# Allegro board CM4_SATAX4_Substrate_V11-0307.brd
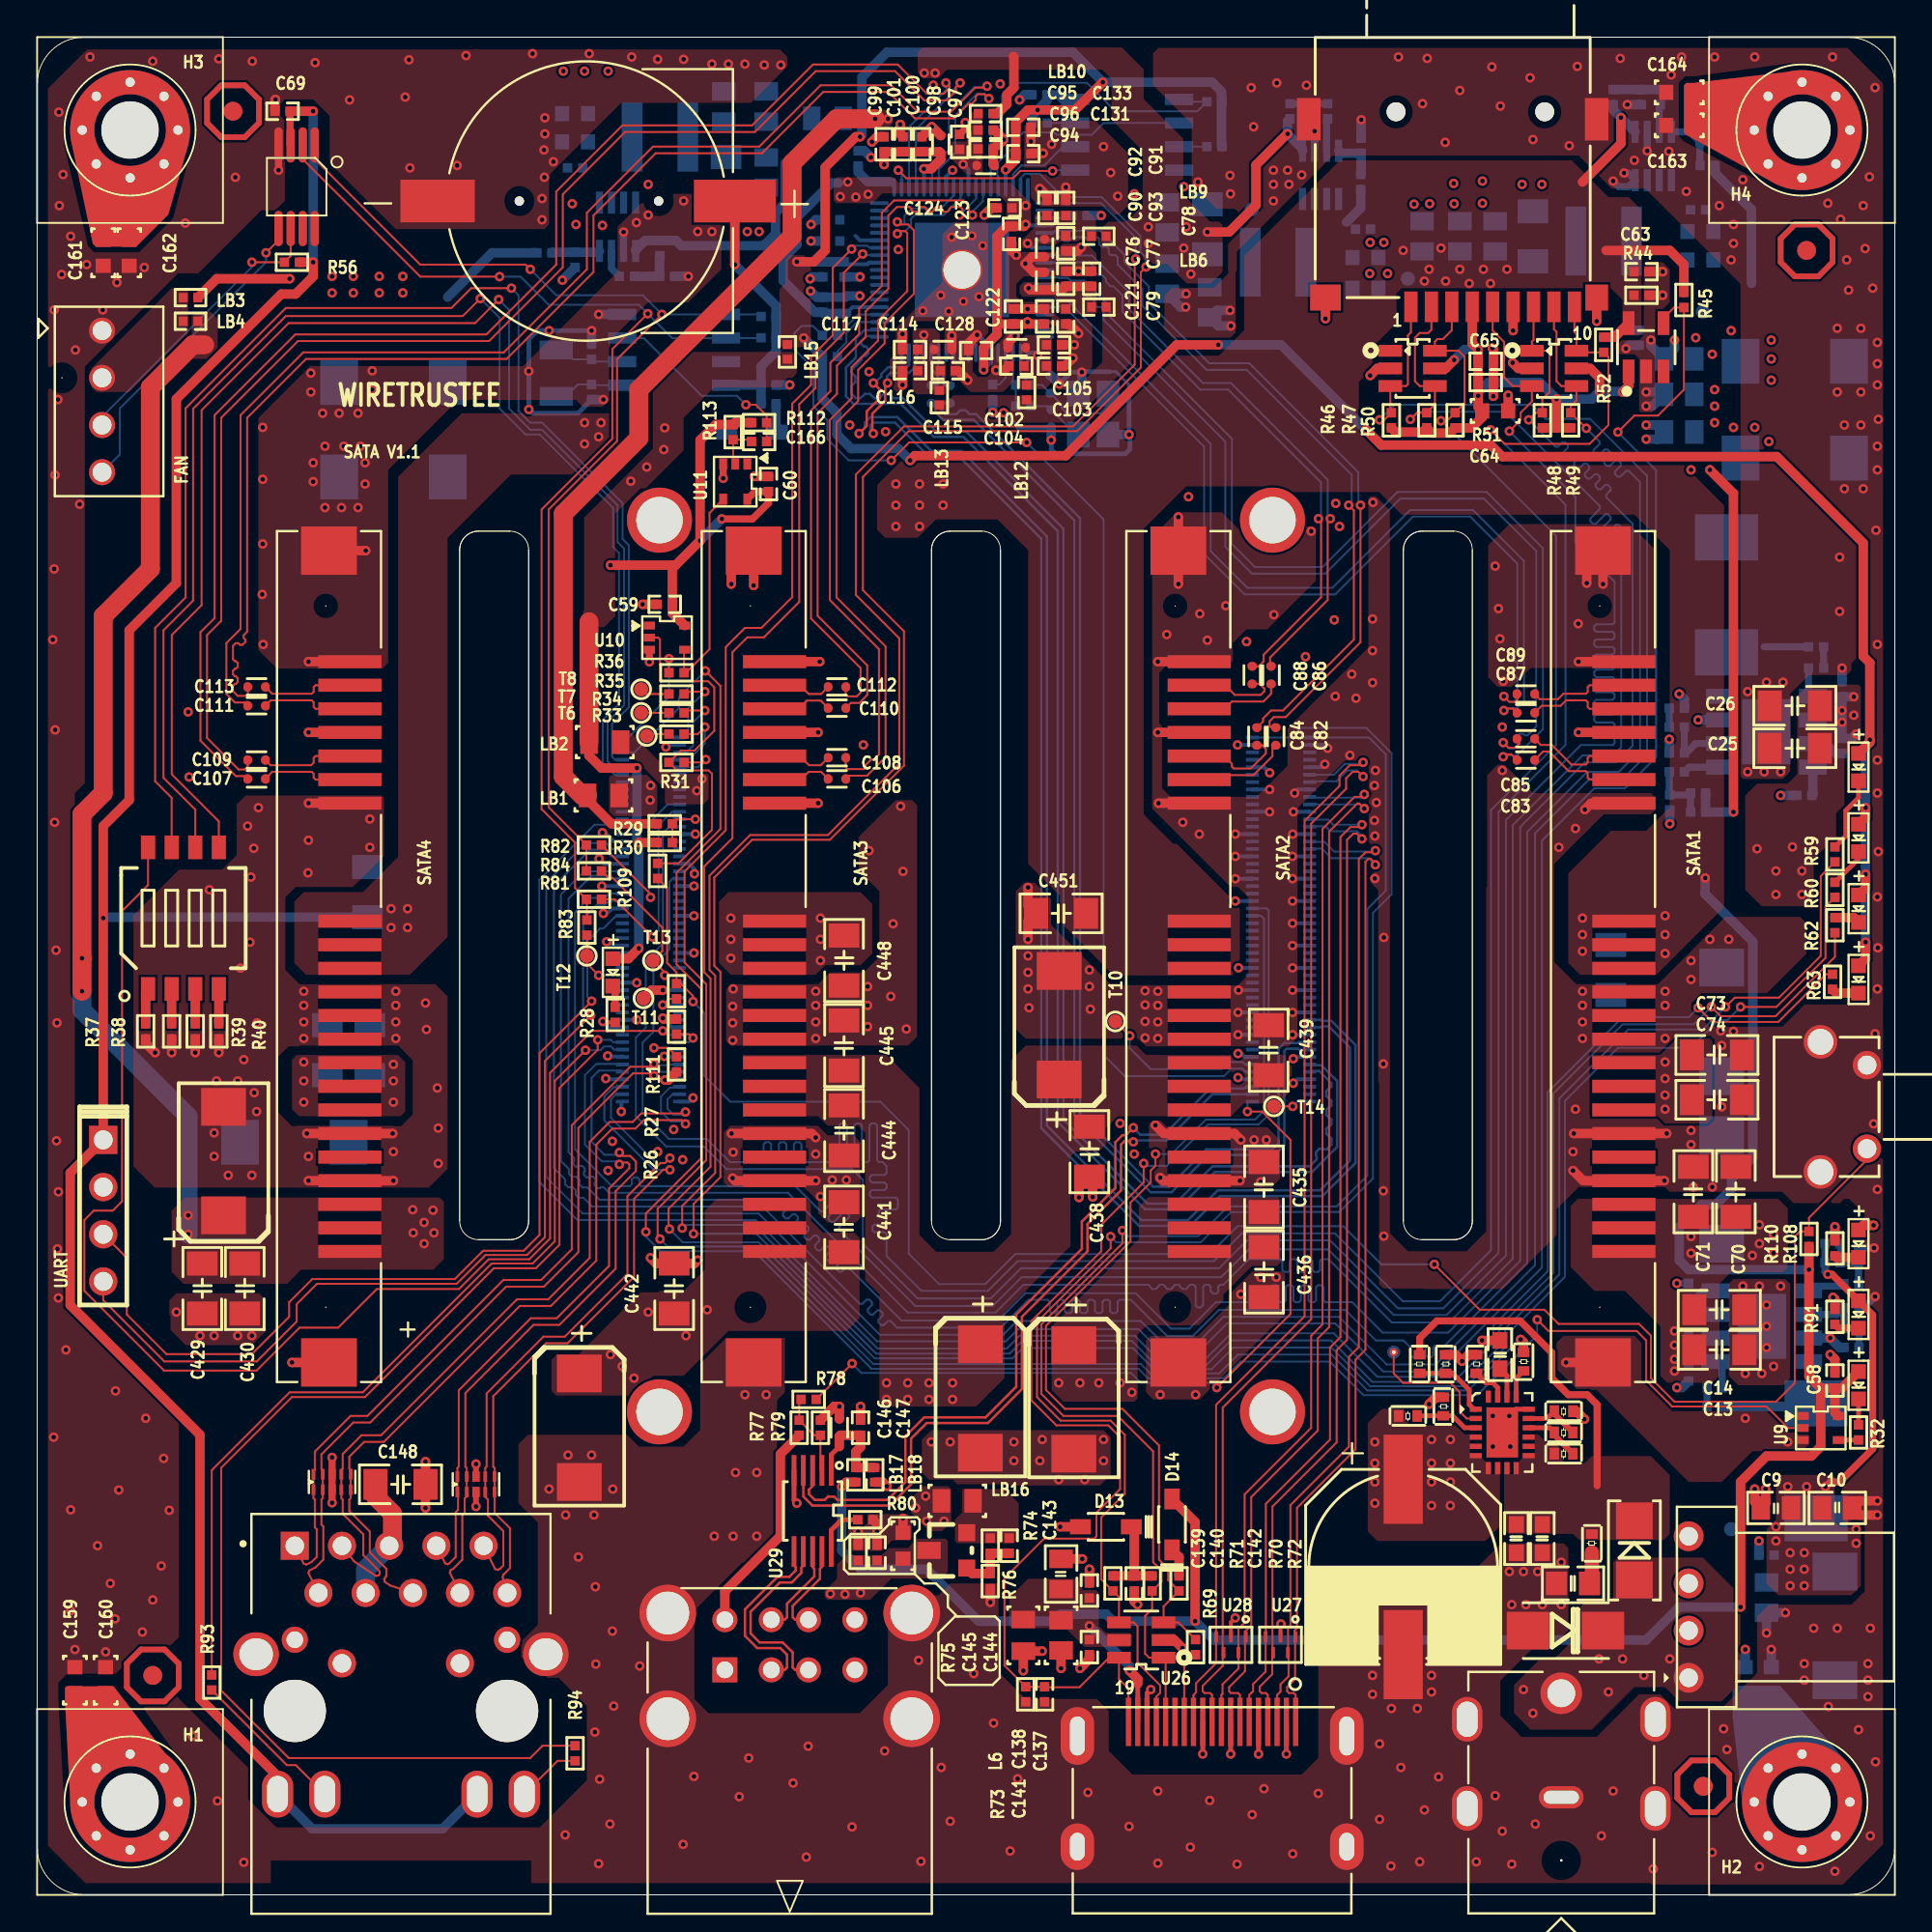
[diagram p0: board, top side]
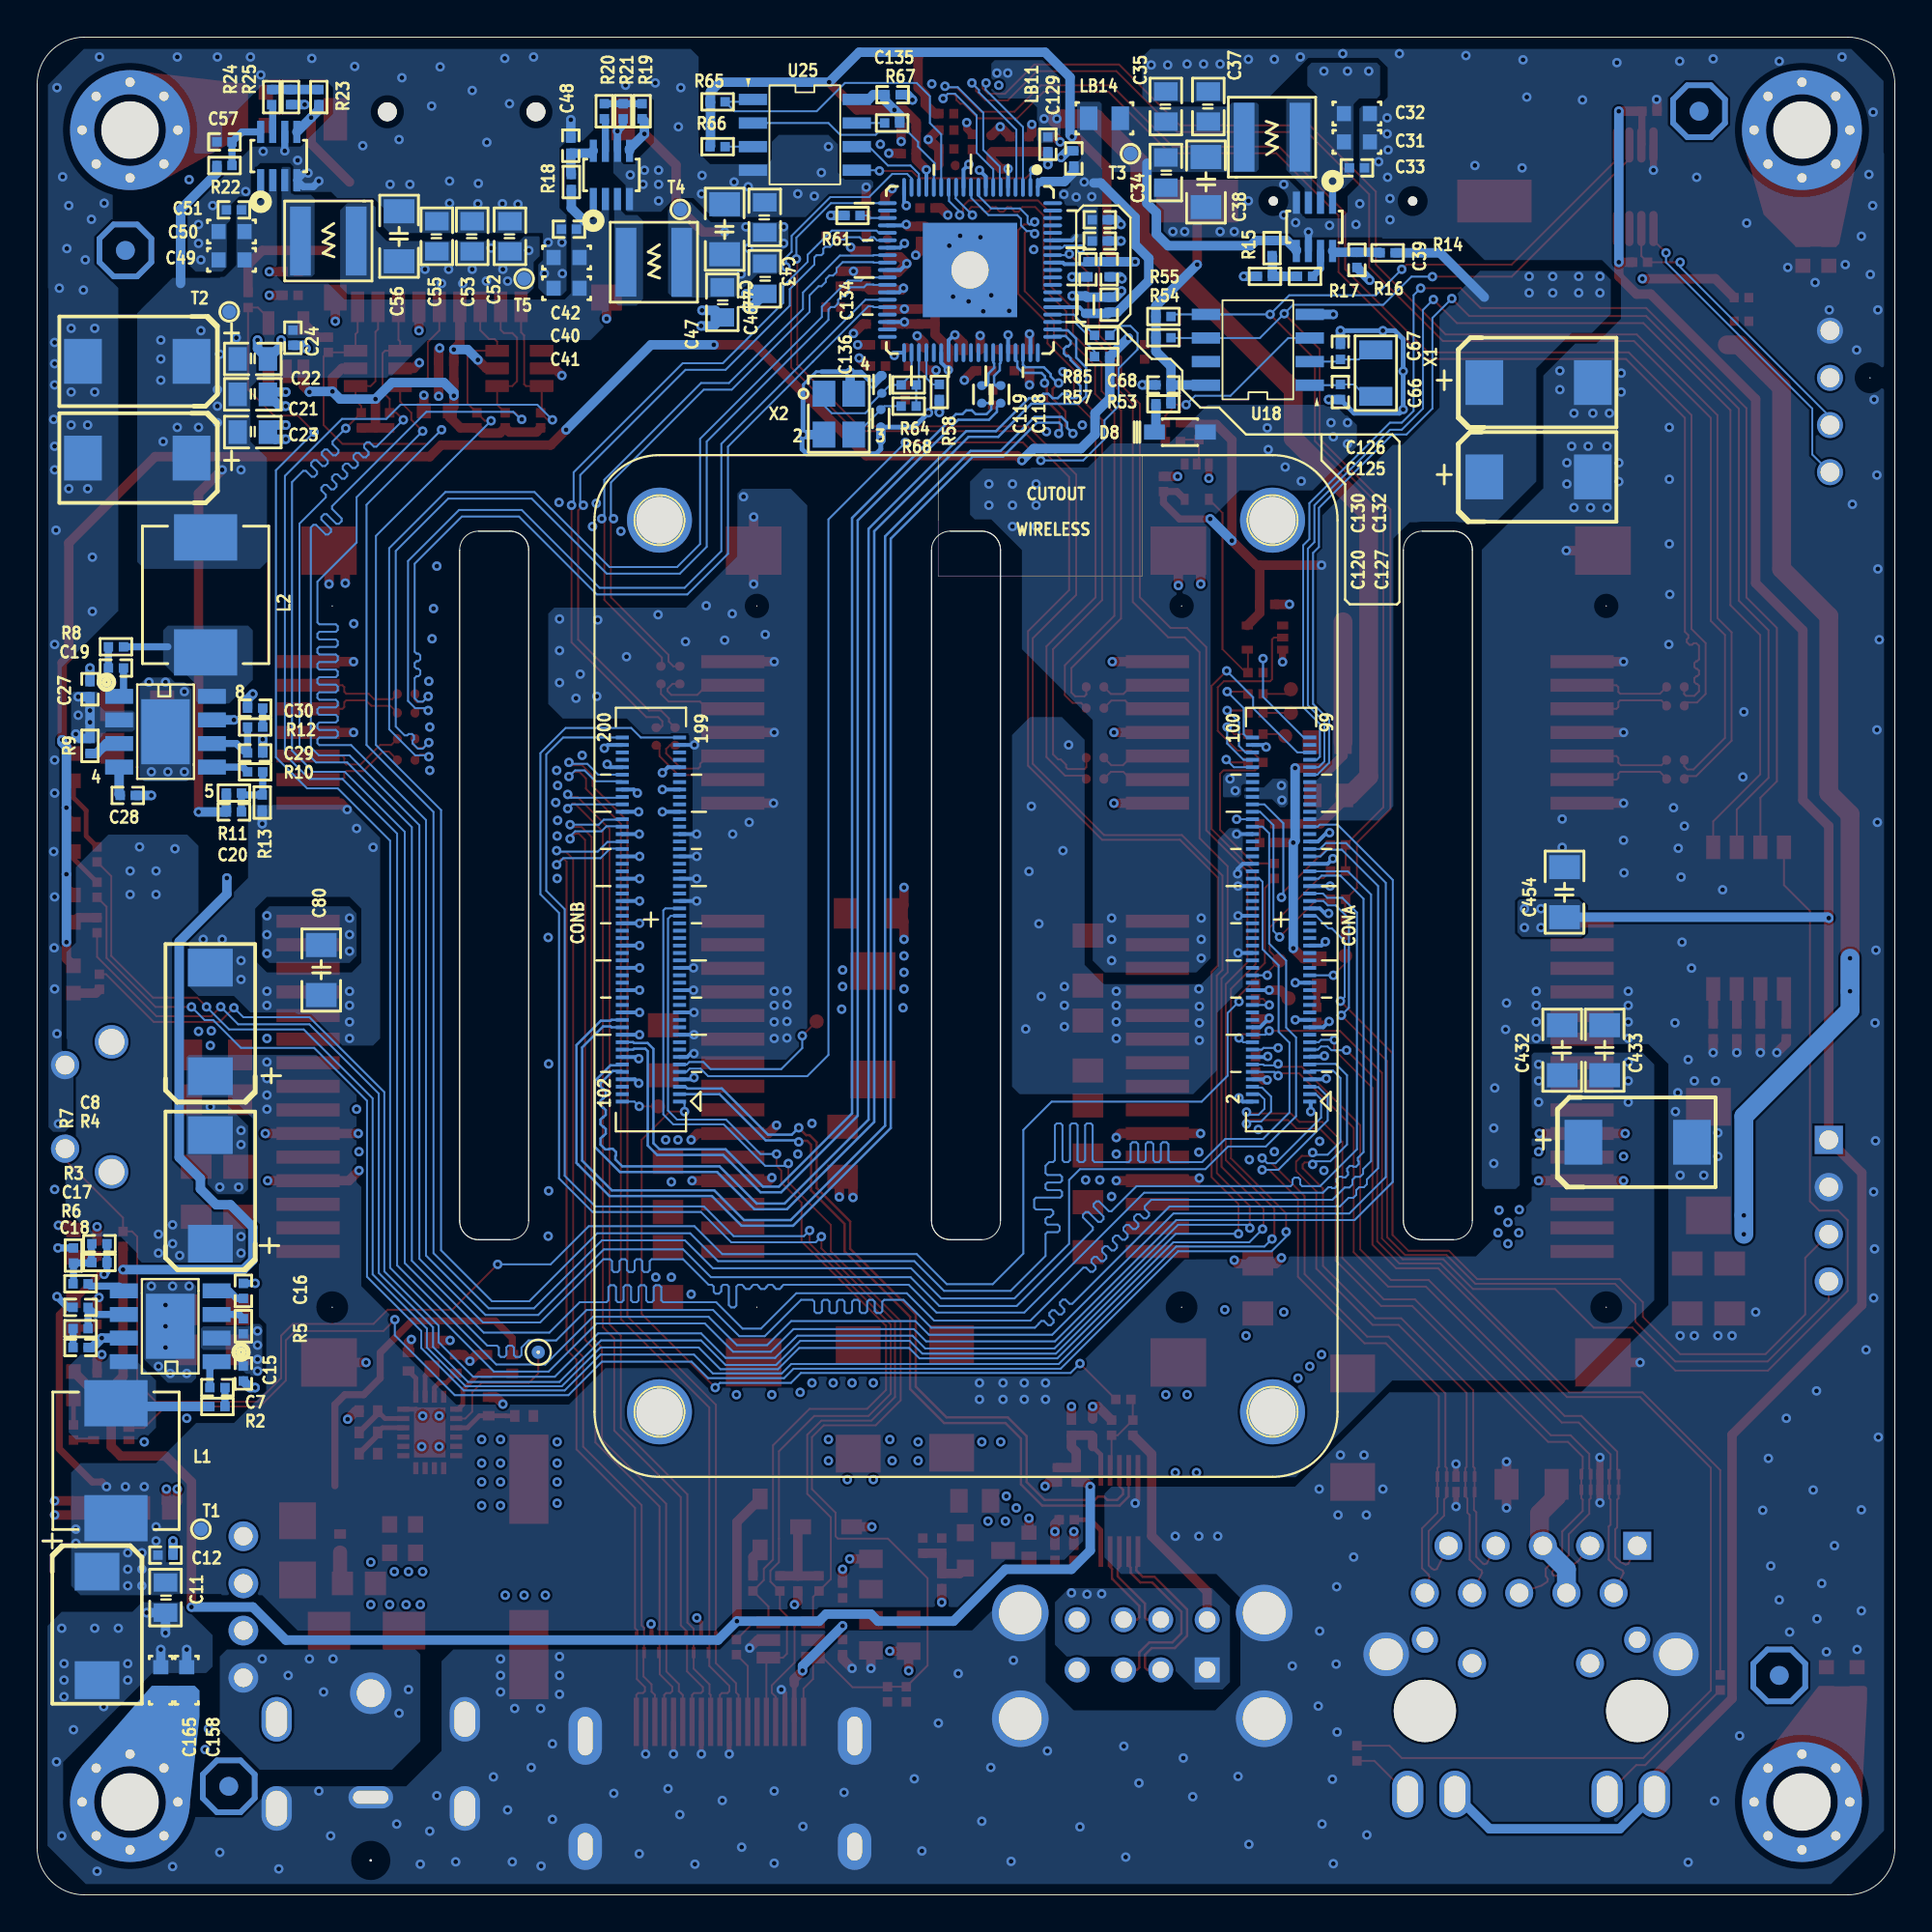
[diagram p1: board, bottom side, seen from below]

Outline 100 x 100 mm; copper layers: TOP, L2_GND, L3_VCC, BOTTOM. Coordinates in mm from the lower left corner of the outline.
Outline path: circle c5,95 r1.52 ; circle c5,5 r1.52 ; circle c95,95 r1.52 ; circle c95,5 r1.52 ; 22.74,72.39 22.74,36.28 ; 22.74,72.39 arc(23.04,73.11) 23.76,73.41 ; 22.74,72.39 arc(23.04,73.11) 23.76,73.41 ; 22.74,72.39 22.74,36.28 ; 22.74,36.28 arc(23.04,35.57) 23.76,35.27 ; 23.76,73.41 25.44,73.41 ; 23.76,73.41 25.44,73.41 ; 25.44,73.41 arc(26.16,73.11) 26.46,72.39 ; 23.76,35.27 25.44,35.27 ; 23.76,35.27 25.44,35.27 ; 25.44,35.27 arc(26.16,35.57) 26.46,36.28 ; 25.44,35.27 arc(26.16,35.57) 26.46,36.28 ; 26.46,72.39 26.46,36.28 ; 26.46,72.39 26.46,36.28 ; 48.14,72.39 48.14,36.28 ; 48.14,72.39 arc(48.44,73.11) 49.16,73.41 ; 48.14,72.39 arc(48.44,73.11) 49.16,73.41 ; 48.14,72.39 48.14,36.28 ; 48.14,36.28 arc(48.44,35.57) 49.16,35.27 ; 49.16,73.41 50.84,73.41 ; 49.16,73.41 50.84,73.41 ; 50.84,73.41 arc(51.56,73.11) 51.86,72.39 ; 49.16,35.27 50.84,35.27 ; 49.16,35.27 50.84,35.27 ; 50.84,35.27 arc(51.56,35.57) 51.86,36.28 ; 50.84,35.27 arc(51.56,35.57) 51.86,36.28 ; 51.86,72.39 51.86,36.28 ; 51.86,72.39 51.86,36.28 ; 73.54,72.39 73.54,36.28 ; 73.54,72.39 arc(73.84,73.11) 74.56,73.41 ; 73.54,72.39 arc(73.84,73.11) 74.56,73.41 ; 73.54,72.39 73.54,36.28 ; 73.54,36.28 arc(73.84,35.57) 74.56,35.27 ; 74.56,73.41 76.24,73.41 ; 74.56,73.41 76.24,73.41 ; 76.24,73.41 arc(76.96,73.11) 77.26,72.39 ; 74.56,35.27 76.24,35.27 ; 74.56,35.27 76.24,35.27 ; 76.24,35.27 arc(76.96,35.57) 77.26,36.28 ; 76.24,35.27 arc(76.96,35.57) 77.26,36.28 ; 77.26,72.39 77.26,36.28 ; 77.26,72.39 77.26,36.28 ; 0,97.46 0,2.54 arc(0.74,0.74) 2.54,0 97.46,0 arc(99.26,0.74) 100,2.54 100,97.46 arc(99.26,99.26) 97.46,100 2.54,100 arc(0.74,99.26) 0,97.46

## Design rules (mm)
net group HDMI0_CLK_: nets HDMI0_CLK_N HDMI0_CLK_P
net group HDMI0_TX0_: nets HDMI0_TX0_N HDMI0_TX0_P
net group HDMI0_TX1_: nets HDMI0_TX1_N HDMI0_TX1_P
net group HDMI0_TX2_: nets HDMI0_TX2_N HDMI0_TX2_P
net group PCIE_CLK_: nets PCIE_CLK_N PCIE_CLK_P
net group PCIE_RX_: nets PCIE_RX_N PCIE_RX_P
net group PCIE_RX_C: nets N17273479 N17273481
net group PCIE_TX_: nets PCIE_TX_N PCIE_TX_P
net group RX_0: nets RXN_0 RXP_0
net group RX_0_C: nets N17279575 N17279577
net group RX_1: nets RXN_1 RXP_1
net group RX_1_C: nets N17279423 N17279425
net group RX_2: nets RXN_2 RXP_2
net group RX_2_C: nets N17279167 N17279169
net group RX_3: nets RXN_3 RXP_3
net group RX_3_C: nets N17279014 N17279017
net group TRD0_: nets TRD0_N TRD0_P
net group TRD1_: nets TRD1_N TRD1_P
net group TRD2_: nets TRD2_N TRD2_P
net group TRD3_: nets TRD3_N TRD3_P
net group TX_0: nets TXN_0 TXP_0
net group TX_0_R: nets N17279547 N17279557
net group TX_1: nets TXN_1 TXP_1
net group TX_1_C: nets N17279395 N17279405
net group TX_2: nets TXN_2 TXP_2
net group TX_2_C: nets N17279139 N17279149
net group TX_3: nets TXN_3 TXP_3
net group TX_3_C: nets N17278927 N17278965
net group 90OHM: nets D1N D1P D2N D2P USB_N USB_P
net group POWER: nets SATA_VAA2_3 SDIO0_VDD_3.3V VBUS1

## Placement (name value [footprint] x y rotation side)
C7  -  [SC0402]  90.3 27.3 0 bottom
C8  -  [SC0402]  96.65 35.05 0 bottom
C9  10UF  [SC0805]  93.6 20.83 180 top
C10  10UF  [SC0805]  96.9 20.83 0 top
C11  10UF  [SC0805]  93.09 16 270 bottom
C12  -  [SC0402]  93.09 18.29 180 bottom
C13  -  [SC1206]  90.55 29.34 0 top
C14  -  [SC1206]  90.55 31.5 0 top
C15  -  [SC0402]  88.9 28.07 270 bottom
C16  -  [SC0402]  88.9 32.51 90 bottom
C17  -  [SC0402]  97.66 31.62 0 bottom
C18  -  [SC0402]  97.66 29.46 180 bottom
C19  -  [SC0402]  95.76 66.04 180 bottom
C20  -  [SC0402]  89.41 58.29 180 bottom
C21  10UF  [SC0805]  88.39 80.77 180 bottom
C22  10UF  [SC0805]  88.39 82.68 180 bottom
C23  10UF  [SC0805]  88.39 78.74 180 bottom
C24  -  [SC0402]  86.23 83.82 270 bottom
C25  -  [SC1206]  94.61 61.72 180 top
C26  -  [SC1206]  94.61 64.01 180 top
C27  -  [SC0402]  97.16 64.9 90 bottom
C28  -  [SC0402]  95.12 59.18 180 bottom
C29  -  [SC0402]  88.27 61.47 180 bottom
C30  -  [SC0402]  88.27 63.88 0 bottom
C31  10UF  [SC0603]  28.96 94.36 180 bottom
C32  10UF  [SC0603]  28.96 95.89 180 bottom
C33  -  [SC0402]  28.96 92.96 180 bottom
C34  10UF  [SC0805]  39.24 92.71 270 bottom
C35  10UF  [SC0805]  39.24 96.27 90 bottom
C37  10UF  [SC0805]  36.96 96.27 90 bottom
C38  -  [SC1206]  37.08 92.2 270 bottom
C39  -  [SC0402]  28.96 88.01 270 bottom
C40  10UF  [SC0603]  71.5 88.14 0 bottom
C41  10UF  [SC0603]  71.5 86.49 0 bottom
C42  -  [SC0402]  71.37 89.66 0 bottom
C43  10UF  [SC0805]  60.83 87 270 bottom
C44  10UF  [SC0805]  63.12 85.72 270 bottom
C46  10UF  [SC0805]  60.83 90.3 90 bottom
C47  -  [SC1206]  62.99 89.66 90 bottom
C48  -  [SC0402]  71.27 94.16 90 bottom
C49  10UF  [SC0603]  89.53 88.01 0 bottom
C50  10UF  [SC0603]  89.53 89.53 0 bottom
C51  -  [SC0402]  89.41 90.7 0 bottom
C52  10UF  [SC0805]  74.55 89.28 90 bottom
C53  10UF  [SC0805]  76.58 89.28 90 bottom
C55  10UF  [SC0805]  78.49 89.28 90 bottom
C56  -  [SC1206]  80.52 89.28 90 bottom
C57  -  [SC0402]  89.92 94.36 0 bottom
C58  -  [SC0402]  96.77 27.69 90 top
C59  -  [SC0402]  33.78 69.47 180 top
C60  -  [SC0402]  39.37 75.95 90 top
C63  -  [SC0402]  86.36 87.38 0 top
C64  10UF  [SC0603]  78.49 79.88 0 top
C65  -  [SC0402]  77.98 82.55 0 top
C66  -  [SC0402]  29.84 80.9 270 bottom
C67  -  [SC0402]  29.84 83.06 90 bottom
C68  2.2UF  [HSC0402]  39.37 81.28 0 bottom
C69  2.2UF  [HSC0402]  13.21 96.01 180 top
C70  -  [SC1206]  91.44 37.85 90 top
C71  -  [SC1206]  89.15 37.85 90 top
C73  -  [SC1206]  90.42 45.21 0 top
C74  -  [SC1206]  90.42 42.8 0 top
C76  470NF  [SC0402-BGA]  54.23 86.87 90 top
C77  -  [SC0402]  55.37 87 90 top
C78  -  [SC0402]  56.77 87 90 top
C79  -  [SC0402]  55.37 84.96 270 top
C80  -  [SC1206]  84.71 49.78 270 bottom
C82  470NF  [SC0402-BGA]  66.67 62.36 270 top
C83  470NF  [SC0402-BGA]  80.14 61.09 0 top
C84  470NF  [SC0402-BGA]  65.66 62.36 270 top
C85  470NF  [SC0402-BGA]  80.14 62.23 0 top
C86  470NF  [SC0402-BGA]  66.42 65.66 270 top
C87  470NF  [SC0402-BGA]  80.14 63.63 0 top
C88  470NF  [SC0402-BGA]  65.41 65.66 270 top
C89  470NF  [SC0402-BGA]  80.14 64.64 0 top
C90  470NF  [SC0402-BGA]  54.23 88.65 270 top
C91  -  [SC0402]  55.37 90.81 90 top
C92  -  [SC0402]  54.36 90.81 90 top
C93  -  [SC0402]  55.37 88.9 270 top
C94  470NF  [SC0402-BGA]  51.05 93.09 0 top
C95  -  [SC0402]  51.05 95 0 top
C96  -  [SC0402]  51.05 93.98 0 top
C97  -  [SC0402]  49.66 94.36 90 top
C98  470NF  [SC0402-BGA]  48.64 94.23 90 top
C99  -  [SC0402]  45.59 94.23 90 top
C100  -  [SC0402]  47.62 94.23 90 top
C101  -  [SC0402]  46.61 94.23 90 top
C102  470NF  [SC0402-BGA]  52.73 83.29 180 top
C103  -  [SC0402]  54.74 82.3 0 top
C104  -  [SC0402]  52.7 82.3 180 top
C105  -  [SC0402]  54.74 83.44 0 top
C106  470NF  [SC0402-BGA]  43.05 60.07 180 top
C107  470NF  [SC0402-BGA]  11.81 60.07 0 top
C108  470NF  [SC0402-BGA]  43.05 61.21 180 top
C109  470NF  [SC0402-BGA]  11.81 61.09 0 top
C110  470NF  [SC0402-BGA]  43.05 63.88 180 top
C111  470NF  [SC0402-BGA]  11.81 64.01 0 top
C112  470NF  [SC0402-BGA]  43.05 65.02 180 top
C113  470NF  [SC0402-BGA]  11.81 65.02 0 top
C114  470NF  [SC0402-BGA]  48.77 83.19 0 top
C115  -  [SC0402]  49.02 82.04 0 top
C116  -  [SC0402]  46.99 82.04 180 top
C117  -  [SC0402]  46.99 83.19 180 top
C118  470NF  [SC0402-BGA]  48.13 80.77 270 bottom
C119  470NF  [SC0402-BGA]  49.15 80.77 270 bottom
C120  470NF  [SC0402-BGA]  43.56 85.6 90 bottom
C121  -  [SC0402]  54.23 84.96 90 top
C122  -  [SC0402]  52.55 84.96 90 top
C123  -  [SC0402]  52.45 89.41 270 top
C124  -  [SC0402]  52.07 90.81 180 top
C125  -  [SC0402]  42.8 89.03 180 bottom
C126  -  [SC0402]  42.8 90.17 180 bottom
C127  -  [SC0402]  42.29 85.6 90 bottom
C128  -  [SC0402]  50.55 83.13 180 top
C129  -  [SC0402]  44.2 93.47 90 bottom
C130  -  [SC0402]  43.43 87.5 270 bottom
C131  -  [SC0402]  53.09 93.73 0 top
C132  -  [SC0402]  42.29 87.5 270 bottom
C133  -  [SC0402]  53.09 95.15 0 top
C134  470NF  [SC0402-BGA]  54.53 81.31 270 bottom
C135  -  [SC0402]  53.95 96.9 180 bottom
C136  470NF  [SC0402-BGA]  54.58 79.48 90 bottom
C137  -  [SC0402]  56.64 13.34 270 top
C138  47uF  [SC0805B]  55.12 13.97 270 top
C139  10UF  [SC0805]  55.12 17.27 90 top
C140  -  [SC0402]  56.64 16.38 90 top
C141  -  [SC0402]  54.23 10.79 270 top
C142  -  [SC0402]  59.05 16.76 270 top
C143  -  [SC0402]  52.32 18.8 270 top
C144  10UF  [SC0603]  46.61 18.8 90 top
C145  -  [SC0402]  45.21 18.41 90 top
C146  470NF  [SC0402-BGA]  43.18 25.15 90 top
C147  -  [SC0402]  44.32 25.15 90 top
C148  -  [SC1206]  19.56 22.1 180 top
C150  -  [C0603]  79.63 19.18 270 top
C151  X_MS412  [C0805]  82.68 16.76 180 top
C152  -  [C0603]  81.03 19.18 270 top
C153  -  [C0603]  78.74 29.08 90 top
C157  -  [CAP_10X10D3_SMD]  73.53 17.65 0 top
C158  10UF  [SC0603]  91.95 11.56 90 bottom
C159  10UF  [SC0603]  2.03 11.56 90 top
C160  10UF  [SC0603]  3.68 11.56 90 top
C161  10UF  [SC0603]  3.56 88.39 270 top
C162  10UF  [SC0603]  4.95 88.39 270 top
C163  10UF  [SC0603]  88.39 95.25 180 top
C164  10UF  [SC0603]  88.39 97.03 180 top
C165  10UF  [SC0603]  93.34 11.56 90 bottom
C166  -  [SC0402]  38.86 78.23 180 top
C413  VALUE  [CT7343]  19.18 76.33 180 bottom
C414  VALUE  [CT7343]  19.18 81.41 180 bottom
C416  VALUE  [CT7343]  96.77 14.48 270 bottom
C417  VALUE  [CT7343]  94.61 77.34 0 bottom
C418  VALUE  [CT7343]  94.61 82.55 0 bottom
C420  VALUE  [CT7343]  90.68 37.97 90 bottom
C422  VALUE  [CT7343]  90.68 46.99 90 bottom
C428  VALUE  [CT7343]  10.03 39.5 90 top
C429  -  [SC1206]  8.89 32.64 270 top
C430  -  [SC1206]  11.18 32.64 270 top
C431  VALUE  [CT7343]  13.84 40.51 180 bottom
C432  -  [SC1206]  17.91 45.47 90 bottom
C433  -  [SC1206]  15.62 45.47 90 bottom
C434  VALUE  [CT7343]  55.8 26.67 270 top
C435  -  [SC1206]  66.04 38.1 90 top
C436  -  [SC1206]  66.04 33.53 270 top
C437  VALUE  [CT7343]  55.02 46.81 90 top
C438  -  [SC1206]  56.64 40.01 270 top
C439  -  [SC1206]  66.29 45.47 90 top
C440  VALUE  [CT7343]  29.18 25.15 270 top
C441  -  [SC1206]  43.43 35.94 90 top
C442  -  [SC1206]  34.29 32.64 90 top
C443  VALUE  [CT7343]  50.77 26.72 270 top
C444  -  [SC1206]  43.43 41.15 270 top
C445  -  [SC1206]  43.43 45.72 90 top
C448  -  [SC1206]  43.43 50.29 270 top
C451  -  [SC1206]  55.12 52.83 180 top
C454  -  [SC1206]  17.78 53.98 90 bottom
D5  LED  [HSD0603-LED]  30.99 49.66 270 top
D6  LED  [HSD0603-LED]  98.04 27.43 270 top
D8  D_A  [HSOD323A]  38.48 78.74 0 bottom
D9  LED  [HSD0603-LED]  98.04 60.71 270 top
D10  LED  [HSD0603-LED]  98.04 56.9 270 top
D11  LED  [HSD0603-LED]  98.04 53.09 270 top
D12  LED  [HSD0603-LED]  98.04 49.28 270 top
D13  D_A  [HSOD323A]  57.53 19.81 0 top
D14  D_A  [HSOD323A]  61.09 19.94 270 top
D15  LED  [HSD0603-LED]  98.04 31.24 270 top
D16  IN5822 SS34 =NC  [DO_214ADSMD]  85.98 18.54 90 top
D17  SMAJ15CA=NC  [SMA1]  82.3 14.22 0 top
D18  LED  [HSD0603-LED]  98.04 35.05 270 top
H1  -  [TH_8_120_S]  5 5 0 top
H2  -  [TH_8_120_S]  95 5 0 top
H3  -  [TH_8_120_S]  5 95 0 top
H4  -  [TH_8_120_S]  95 95 0 top
J2  -  [CON-1X4-D100-RA-2510]  88.9 11.68 90 top
J3  475792245  [TF_CARD-MISOSD]  76.2 95.98 180 top
J4  -  [WAFER_1X4_2D54_TH]  3.49 80.39 270 top
J5  -  [HDMI19_P0D5_15X12_H4D5]  63.25 9.31 0 top
L1  2.2UH  [SPL0707G]  95.76 23.37 270 bottom
L2  2.2UH  [SPL0707G]  90.93 69.98 90 bottom
L3  #VALUE  [SWPA4030S]  33.53 94.61 0 bottom
L4  #VALUE  [SWPA4030S]  66.8 87.88 180 bottom
L5  #VALUE  [SWPA4030S]  84.33 89.03 180 bottom
L6  MGLB2012_220T_LF  [SL0805]  53.09 13.97 90 top
LB1  MGLB2012_220T_LF  [SL0805]  30.48 59.18 0 top
LB2  MGLB2012_220T_LF  [SL0805]  30.56 62.05 0 top
LB3  BLM15HG102SN1D  [SL0402]  8.26 85.98 180 top
LB4  BLM15HG102SN1D  [SL0402]  8.26 84.71 180 top
LB6  BLM15HG102SN1D  [SL0402]  57.15 85.47 180 top
LB9  BLM15HG102SN1D  [SL0402]  57.15 89.28 180 top
LB10  BLM15HG102SN1D  [SL0402]  51.05 95.89 180 top
LB11  BLM15HG102SN1D  [SL0402]  45.59 94.23 270 bottom
LB12  BLM15HG102SN1D  [SL0402]  53.26 80.87 90 top
LB13  BLM15HG102SN1D  [SL0402]  48.56 80.59 90 top
LB14  MGLB2012_220T_LF  [SL0805]  42.55 95.63 0 bottom
LB15  BLM15HG102SN1D  [SL0402]  40.39 83.06 90 top
LB16  MGLB2012_220T_LF  [SL0805]  49.53 21.21 0 top
LB17  BLM15HG102SN1D  [SL0402]  44.07 22.61 90 top
LB18  BLM15HG102SN1D  [SL0402]  45.08 22.61 90 top
NOREF  -  [unnamed]  89.69 5.84 0 top
NOREF#2  -  [#2]  5 5 90 top
NOREF#3  -  [#2]  5 5 0 top
NOREF#4  -  [unnamed]  6.22 11.81 0 top
NOREF#5  -  [#2]  97.46 0 90 top
NOREF#6  -  [#2]  0 97.46 0 top
NOREF#7  -  [#2]  95 5 90 top
NOREF#8  -  [#2]  5 95 0 top
NOREF#9  -  [unnamed]  95.25 88.52 0 top
NOREF#10  -  [unnamed]  10.54 96.01 0 top
NOREF#11  -  [unnamed]  10.54 96.01 180 bottom
NOREF#12  -  [unnamed]  89.69 5.84 180 bottom
NOREF#13  -  [unnamed]  6.22 11.81 180 bottom
NOREF#14  -  [unnamed]  95.25 88.52 180 bottom
Q1  #VAL  [SOT23]  49.05 18.54 90 top
R2  100  [SR0402]  90.3 26.29 0 bottom
R3  100  [SR0402]  97.66 32.89 0 bottom
R4  100  [SR0402]  96.65 34.04 0 bottom
R5  100  [SR0402]  88.9 30.61 90 bottom
R6  100  [SR0402]  97.66 30.48 180 bottom
R7  100  [SR0402]  98.04 34.42 90 bottom
R8  100  [SR0402]  95.76 67.18 180 bottom
R9  100  [SR0402]  97.16 61.85 270 bottom
R10  100  [SR0402]  88.26 60.45 180 bottom
R11  100  [SR0402]  89.41 59.31 180 bottom
R12  100  [SR0402]  88.27 62.87 0 bottom
R13  100  [SR0402]  87.88 58.8 270 bottom
R14  100  [SR0402]  27.3 88.39 0 bottom
R15  100  [SR0402]  33.53 88.65 270 bottom
R16  100  [SR0402]  31.75 87.12 0 bottom
R17  100  [SR0402]  33.91 87.12 0 bottom
R18  100  [SR0402]  71.25 92.2 90 bottom
R19  100  [SR0402]  67.44 96.01 90 bottom
R20  100  [SR0402]  69.47 96.01 90 bottom
R21  100  [SR0402]  68.45 96.01 270 bottom
R22  100  [SR0402]  89.92 93.09 180 bottom
R23  100  [SR0402]  84.84 96.77 90 bottom
R24  100  [SR0402]  87.38 96.77 90 bottom
R25  100  [SR0402]  86.36 96.77 270 bottom
R26  100  [SR0402]  34.42 44.7 90 top
R27  100  [SR0402]  34.42 46.74 270 top
R28  100  [SR0402]  31.11 47.37 90 top
R29  100  [SR0402]  33.78 57.66 0 top
R30  100  [SR0402]  33.78 56.64 0 top
R31  100  [SR0402]  34.42 60.96 0 top
R32  100  [SR0402]  98.04 24.89 90 top
R33  100  [SR0402]  34.42 62.48 0 top
R34  100  [SR0402]  34.42 63.63 0 top
R35  100  [SR0402]  34.42 64.64 0 top
R36  100  [SR0402]  34.42 65.79 0 top
R37  100  [SR0402]  5.84 46.48 90 top
R38  100  [SR0402]  7.24 46.48 90 top
R39  100  [SR0402]  8.51 46.48 90 top
R40  100  [SR0402]  9.78 46.48 90 top
R44  100  [SR0402]  86.36 86.11 0 top
R45  100  [SR0402]  88.65 85.85 270 top
R46  100  [SR0402]  72.9 79.38 90 top
R47  100  [SR0402]  74.8 79.38 90 top
R48  100  [SR0402]  81.03 79.38 90 top
R49  100  [SR0402]  82.55 79.38 90 top
R50  100  [SR0402]  76.33 79.38 90 top
R51  100  [SR0402]  77.98 81.41 0 top
R52  100  [SR0402]  84.33 83.44 270 top
R53  100  [SR0402]  39.37 80.26 180 bottom
R54  100  [SR0402]  39.37 83.82 180 bottom
R55  100  [SR0402]  39.37 84.96 180 bottom
R56  100  [SR0402]  13.72 87.88 180 top
R57  100  [SR0402]  42.67 82.8 180 bottom
R58  100  [SR0402]  51.44 80.9 270 bottom
R59  100  [SR0402]  96.77 56.01 90 top
R60  100  [SR0402]  96.77 54.1 90 top
R61  100  [SR0402]  56.11 90.4 0 bottom
R62  100  [SR0402]  96.77 52.2 90 top
R63  100  [SR0402]  96.65 49.15 270 top
R64  100  [SR0402]  53.09 81.28 180 bottom
R65  100  [SR0402]  63.37 96.52 180 bottom
R66  100  [SR0402]  63.37 94.11 180 bottom
R67  100  [SR0402]  53.98 95.38 0 bottom
R68  100  [SR0402]  53.09 80.14 180 bottom
R69  100  [SR0402]  62.36 13.34 270 top
R70  100  [SR0402]  60.02 16.76 90 top
R71  100  [SR0402]  57.91 16.76 90 top
R72  100  [SR0402]  61.47 16.76 270 top
R73  100  [SR0402]  53.21 10.79 270 top
R74  100  [SR0402]  51.31 18.8 270 top
R75  100  [SR0402]  44.2 18.41 90 top
R76  100  [SR0402]  51.31 16.89 90 top
R77  100  [SR0402]  41.02 25.15 90 top
R78  100  [SR0402]  41.53 26.67 180 top
R79  100  [SR0402]  42.16 25.15 90 top
R80  100  [SR0402]  44.58 20.19 0 top
R81  100  [SR0402]  29.97 53.59 180 top
R82  100  [SR0402]  29.97 56.52 180 top
R83  100  [SR0402]  29.59 52.07 90 top
R84  100  [SR0402]  29.97 55.12 180 top
R85  100  [SR0402]  42.67 83.95 180 bottom
R91  100  [SR0402]  96.77 31.11 270 top
R93  100  [SR0402]  9.4 11.43 90 top
R94  100  [SR0402]  28.96 7.62 90 top
R98  5.1k  [R0402]  83.69 18.92 270 top
R99  5.1k  [R0402]  75.82 28.58 90 top
R100  5.1k  [R0402]  74.42 28.57 270 top
R101  5.1k  [R0402]  82.17 26.04 0 top
R102  5.1k  [R0402]  82.17 24.89 0 top
R103  5.1k  [R0402]  82.17 23.75 0 top
R104  5.1k  [R0402]  77.47 28.58 90 top
R105  5.1k  [R0402]  80.01 28.7 90 top
R106  5.1k  [R0402]  75.69 26.29 90 top
R107  5.1k  [R0402]  73.79 25.78 0 top
R108  100  [SR0402]  96.77 34.8 270 top
R109  100  [SR0402]  33.4 55.12 270 top
R110  100  [SR0402]  95.38 35.31 270 top
R111  100  [SR0402]  34.42 48.64 90 top
R112  100  [SR0402]  38.86 79.25 180 top
R113  100  [SR0402]  37.47 78.74 90 top
SW1  -  [SWIC_4P_1D27_6D7X8_H2D3]  7.87 52.58 0 top
T1  -  [TP_40]  91.19 19.68 180 bottom
T2  -  [TP_40]  89.66 85.22 180 bottom
T3  -  [TP_40]  41.15 93.73 90 bottom
T4  -  [TP_40]  65.38 90.73 270 bottom
T5  -  [TP_40]  73.79 87 270 bottom
T6  -  [TP_40]  32.82 62.38 0 top
T7  -  [TP_40]  32.51 63.63 0 top
T8  -  [TP_40]  32.51 64.9 0 top
T10  -  [TP_40]  58.04 47.02 0 top
T11  -  [TP_40]  32.64 48.26 180 top
T12  -  [TP_40]  29.59 50.55 0 top
T13  -  [TP_40]  33.15 50.29 0 top
T14  -  [TP_40]  66.57 42.44 0 top
TP4  -  [LTPB071C125D045C025P]  73.03 29.21 270 top
U3  -  [SO8EP_P1D27_W4]  92.84 30.61 0 bottom
U4  -  [SO8EP_P1D27_W4]  93.09 62.61 180 bottom
U5  NC  [TSOT23-8]  31.24 89.79 0 bottom
U6  NC  [TSOT23-8]  69.09 92.58 180 bottom
U7  NC  [TSOT23-8]  87 93.6 180 bottom
U8  -  [CM4_2X100]  50 52.5 0 bottom
U9  -  [SOT353]  96.01 25.13 180 top
U10  -  [SOT353]  33.91 67.68 180 top
U11  -  [SOT353]  37.58 76.07 90 top
U12  #VAL  [USON10_P0D5_W0D9]  15.88 22.23 0 top
U13  #VAL  [USON10_P0D5_W0D9]  23.62 22.1 0 top
U14  -  [SOT23_5]  86.62 83.31 0 top
U15  AZC199-04S  [SOT23-6L]  81.66 82.17 270 top
U16  AZC199-04S  [SOT23-6L]  74.04 82.17 270 top
U18  -  [SOP8_P1D25_W5]  34.29 83.17 90 bottom
U19  -  [TSSOP8_P0D65_W3]  13.97 91.95 180 top
U20  -  [SATA_22P_SMD_H6_H9]  84.49 50.51 90 top
U21  -  [SATA_22P_SMD_H6_H9]  61.63 50.51 90 top
U22  -  [SATA_22P_SMD_H6_H9]  38.77 50.51 90 top
U23  -  [SATA_22P_SMD_H6_H9]  15.91 50.51 90 top
U24  -  [QFN76P_P0D4_W9X9]  49.78 87.47 0 bottom
U25  -  [SOP8_P1D25_W5]  58.67 94.74 270 bottom
U26  AZC199-04S  [SOT23-6L-KTB]  59.44 13.72 90 top
U27  RCLAMP0564P  [DFN5-0R4-0201-MV]  66.93 13.46 180 top
U28  RCLAMP0564P  [DFN5-0R4-0201-MV]  64.26 13.46 180 top
U29  -  [MSOP10_P0D5_W3]  41.74 20.66 180 top
U30  -  [USB2_0]  37.02 12.11 90 top
U31  -  [RJ45_14X21_H21]  19.58 9.9 180 top
U32  -  [QFN020R_P050_040X0030_T026X016]  78.87 24.89 270 top
U33  #VALUE  [SW_4P-DTSA6]  96 42.42 90 top
U107  -  [PH1X4_2D54]  3.56 40.64 270 top
U111  -  [DCJACK-042CX20]  82.04 -1 180 top
U112  -  [BAT-2P-1220-SMT]  29.56 91.18 0 top
X1  32.768KHZ  [HSX2-0302]  27.94 81.92 90 bottom
X2  24MEG  [HSX4-0302]  56.85 79.71 270 bottom

## Library data of the parts
C7 C8 C12 C15-C20 C24 C27-C30 C33 C39 C42 C48 C51 C57-C60 C63 C65-C67 C77-C79 C91-C93 C95-C97 C99-C101 C103-C105 C115-C117 C121-C133 C135 C137 C140-C143 C145 C147 C166 = SC0402
C9-C11 C21-C23 C34 C35 C37 C43 C44 C46 C52 C53 C55 C139 = SC0805
C13 C14 C25 C26 C38 C47 C56 C70 C71 C73 C74 C80 C148 C429 C430 C432 C433 C435 C436 C438 C439 C441 C442 C444 C445 C448 C451 C454 = SC1206
C31 C32 C40 C41 C49 C50 C64 C144 C158-C165 = SC0603
C68 C69 = HSC0402
C76 C82-C90 C94 C98 C102 C106-C114 C118-C120 C134 C136 C146 = SC0402-BGA
C138 = SC0805B
C150 C152 C153 = C0603
C151 = C0805
C157 = CAP_10X10D3_SMD
C413 C414 C416-C418 C420 C422 C428 C431 C434 C437 C440 C443 = CT7343
D5 D6 D9-D12 D15 D18 = HSD0603-LED
D8 D13 D14 = HSOD323A
D16 = DO_214ADSMD
D17 = SMA1
H1-H4 = TH_8_120_S
J2 = CON-1X4-D100-RA-2510
J3 = TF_CARD-MISOSD
J4 = WAFER_1X4_2D54_TH
J5 = HDMI19_P0D5_15X12_H4D5
L1 L2 = SPL0707G
L3-L5 = SWPA4030S: User Part Number: DENG
L6 LB1 LB2 LB14 LB16 = SL0805
LB3 LB4 LB6 LB9-LB13 LB15 LB17 LB18 = SL0402
Q1 = SOT23: Tolerance: #TOL; User Part Number: HAMP
R2-R40 R44-R85 R91 R93 R94 R108-R113 = SR0402
R98-R107 = R0402: User Part Number: HAMP; Tolerance: #TOL
SW1 = SWIC_4P_1D27_6D7X8_H2D3
T1-T8 T10-T14 = TP_40
TP4 = LTPB071C125D045C025P
U3 U4 = SO8EP_P1D27_W4
U5-U7 = TSOT23-8: Tolerance: #TOL; User Part Number: HAMP
U8 = CM4_2X100
U9-U11 = SOT353
U12 U13 = USON10_P0D5_W0D9: Tolerance: #TOL; User Part Number: HAMP
U14 = SOT23_5
U15 U16 = SOT23-6L
U18 U25 = SOP8_P1D25_W5
U19 = TSSOP8_P0D65_W3
U20-U23 = SATA_22P_SMD_H6_H9
U24 = QFN76P_P0D4_W9X9
U26 = SOT23-6L-KTB
U27 U28 = DFN5-0R4-0201-MV
U29 = MSOP10_P0D5_W3
U30 = USB2_0
U31 = RJ45_14X21_H21
U32 = QFN020R_P050_040X0030_T026X016
U33 = SW_4P-DTSA6: User Part Number: DENG
U107 = PH1X4_2D54
U111 = DCJACK-042CX20
U112 = BAT-2P-1220-SMT
X1 = HSX2-0302
X2 = HSX4-0302

## Footprints (pads in the part's own frame, mm; a bottom-side part is the same pattern mirrored in y, then rotated)
BAT-2P-1220-SMT
  round 0.5 hole 1.2 unplated: (-3.6,0) (3.9,0)
  rect 4.4x2.3 smd: 1(8,0)
  rect 4x2.3 smd: 2(-8,0)
C0603
  rect 0.889x0.813 smd: 1(-0.762,0) 2(0.762,0)
C0805
  rect 1.143x1.27 smd: 1(-0.889,0) 2(0.889,0)
CAP_10X10D3_SMD
  rect 2.108x4.8 smd: 1(0,4.72) 2(0,-4.72)
CM4_2X100
  rect 0.7x0.2 smd: 1(-18.5,9.8) 2(-15.42,9.8) 3(-18.5,9.4) 4(-15.42,9.4) 5(-18.5,9) 6(-15.42,9) 7(-18.5,8.6) 8(-15.42,8.6) 9(-18.5,8.2) 10(-15.42,8.2) 11(-18.5,7.8) 12(-15.42,7.8) 13(-18.5,7.4) 14(-15.42,7.4) 15(-18.5,7) 16(-15.42,7) 17(-18.5,6.6) 18(-15.42,6.6) 19(-18.5,6.2) 20(-15.42,6.2) 21(-18.5,5.8) 22(-15.42,5.8) 23(-18.5,5.4) 24(-15.42,5.4) 25(-18.5,5) 26(-15.42,5) 27(-18.5,4.6) 28(-15.42,4.6) 29(-18.5,4.2) 30(-15.42,4.2) 31(-18.5,3.8) 32(-15.42,3.8) 33(-18.5,3.4) 34(-15.42,3.4) 35(-18.5,3) 36(-15.42,3) 37(-18.5,2.6) 38(-15.42,2.6) 39(-18.5,2.2) 40(-15.42,2.2) 41(-18.5,1.8) 42(-15.42,1.8) 43(-18.5,1.4) 44(-15.42,1.4) 45(-18.5,1) 46(-15.42,1) 47(-18.5,0.6) 48(-15.42,0.6) 49(-18.5,0.2) 50(-15.42,0.2) 51(-18.5,-0.2) 52(-15.42,-0.2) 53(-18.5,-0.6) 54(-15.42,-0.6) 55(-18.5,-1) 56(-15.42,-1) 57(-18.5,-1.4) 58(-15.42,-1.4) 59(-18.5,-1.8) 60(-15.42,-1.8) 61(-18.5,-2.2) 62(-15.42,-2.2) 63(-18.5,-2.6) 64(-15.42,-2.6) 65(-18.5,-3) 66(-15.42,-3) 67(-18.5,-3.4) 68(-15.42,-3.4) 69(-18.5,-3.8) 70(-15.42,-3.8) 71(-18.5,-4.2) 72(-15.42,-4.2) 73(-18.5,-4.6) 74(-15.42,-4.6) 75(-18.5,-5) 76(-15.42,-5) 77(-18.5,-5.4) 78(-15.42,-5.4) 79(-18.5,-5.8) 80(-15.42,-5.8) 81(-18.5,-6.2) 82(-15.42,-6.2) 83(-18.5,-6.6) 84(-15.42,-6.6) 85(-18.5,-7) 86(-15.42,-7) 87(-18.5,-7.4) 88(-15.42,-7.4) 89(-18.5,-7.8) 90(-15.42,-7.8) 91(-18.5,-8.2) 92(-15.42,-8.2) 93(-18.5,-8.6) 94(-15.42,-8.6) 95(-18.5,-9) 96(-15.42,-9) 97(-18.5,-9.4) 98(-15.42,-9.4) 99(-18.5,-9.8) 100(-15.42,-9.8) 101(15.42,9.8) 102(18.5,9.8) 103(15.42,9.4) 104(18.5,9.4) 105(15.42,9) 106(18.5,9) 107(15.42,8.6) 108(18.5,8.6) 109(15.42,8.2) 110(18.5,8.2) 111(15.42,7.8) 112(18.5,7.8) 113(15.42,7.4) 114(18.5,7.4) 115(15.42,7) 116(18.5,7) 117(15.42,6.6) 118(18.5,6.6) 119(15.42,6.2) 120(18.5,6.2) 121(15.42,5.8) 122(18.5,5.8) 123(15.42,5.4) 124(18.5,5.4) 125(15.42,5) 126(18.5,5) 127(15.42,4.6) 128(18.5,4.6) 129(15.42,4.2) 130(18.5,4.2) 131(15.42,3.8) 132(18.5,3.8) 133(15.42,3.4) 134(18.5,3.4) 135(15.42,3) 136(18.5,3) 137(15.42,2.6) 138(18.5,2.6) 139(15.42,2.2) 140(18.5,2.2) 141(15.42,1.8) 142(18.5,1.8) 143(15.42,1.4) 144(18.5,1.4) 145(15.42,1) 146(18.5,1) 147(15.42,0.6) 148(18.5,0.6) 149(15.42,0.2) 150(18.5,0.2) 151(15.42,-0.2) 152(18.5,-0.2) 153(15.42,-0.6) 154(18.5,-0.6) 155(15.42,-1) 156(18.5,-1) 157(15.42,-1.4) 158(18.5,-1.4) 159(15.42,-1.8) 160(18.5,-1.8) 161(15.42,-2.2) 162(18.5,-2.2) 163(15.42,-2.6) 164(18.5,-2.6) 165(15.42,-3) 166(18.5,-3) 167(15.42,-3.4) 168(18.5,-3.4) 169(15.42,-3.8) 170(18.5,-3.8) 171(15.42,-4.2) 172(18.5,-4.2) 173(15.42,-4.6) 174(18.5,-4.6) 175(15.42,-5) 176(18.5,-5) 177(15.42,-5.4) 178(18.5,-5.4) 179(15.42,-5.8) 180(18.5,-5.8) 181(15.42,-6.2) 182(18.5,-6.2) 183(15.42,-6.6) 184(18.5,-6.6) 185(15.42,-7) 186(18.5,-7) 187(15.42,-7.4) 188(18.5,-7.4) 189(15.42,-7.8) 190(18.5,-7.8) 191(15.42,-8.2) 192(18.5,-8.2) 193(15.42,-8.6) 194(18.5,-8.6) 195(15.42,-9) 196(18.5,-9) 197(15.42,-9.4) 198(18.5,-9.4) 199(15.42,-9.8) 200(18.5,-9.8)
  round 3.5 hole 2.5: 201(-16.5,26.5) 202(16.5,26.5) 203(-16.5,-21.5) 204(16.5,-21.5)
CON-1X4-D100-RA-2510
  round 1.6 hole 1: 1(0,0) 2(2.54,0) 3(5.08,0) 4(7.62,0)
CT7343
  rect 2.032x2.413 smd: 1(-2.921,0) 2(2.921,0)
DCJACK-042CX20
  round 0.127 hole 1.7 unplated: (0,-2.85)
  round 2.235 hole 1.5: 1(0,-11.85)
  oval 2.4x1.2 hole 1.9x0.7: 2(0,-6.25)
  oval 1.63x2.4 hole 1.13x1.9: 3(5.065,-10.45) 4(5.065,-5.65) 5(-5.065,-5.65) 6(-5.065,-10.45)
DFN5-0R4-0201-MV
  rect 0.2x0.6 smd: 1(-0.8,-0.425) 2(0,-0.425) 3(0.8,-0.425) 4(0.4,0.425) 5(-0.4,0.425)
DO_214ADSMD
  rect 1.981x1.981 smd: 1(-1.593,0) 2(1.593,0)
HDMI19_P0D5_15X12_H4D5
  rect 0.28x2.6 smd: 1(4.5,0) 2(4,0) 3(3.5,0) 4(3,0) 5(2.5,0) 6(2,0) 7(1.5,0) 8(1,0) 9(0.5,0) 10(0,0) 11(-0.5,0) 12(-1,0) 13(-1.5,0) 14(-2,0) 15(-2.5,0) 16(-3,0) 17(-3.5,0) 18(-4,0) 19(-4.5,0)
  oval 1.8x3.1 hole 0.8x2.1: 20(-7.25,-0.76) 21(7.25,-0.76)
  oval 1.8x2.5 hole 0.8x1.5: 22(7.25,-6.72) 23(-7.25,-6.72)
HSC0402
  rect 0.508x0.508 smd: 1(-0.406,0) 2(0.406,0)
HSD0603-LED
  rect 0.787x0.787 smd: 1(-0.737,0) 2(0.737,0)
HSOD323A
  rect 1.118x0.813 smd: 1(1.372,0) 2(-1.372,0)
HSX2-0302
  rect 1.016x1.778 smd: 1(-1.25,0) 2(1.25,0)
HSX4-0302
  rect 1.397x1.219 smd: 1(-1.1,-0.8) 2(1.1,-0.8) 3(1.1,0.8) 4(-1.1,0.8)
LTPB071C125D045C025P
  round 0.45 hole 0.2: 1(0,0)
MSOP10_P0D5_W3
  rect 0.254x1.651 smd: 1(-1,-2.184) 2(-0.5,-2.184) 3(0,-2.184) 4(0.5,-2.184) 5(1,-2.184) 6(1,2.184) 7(0.5,2.184) 8(0,2.184) 9(-0.5,2.184) 10(-1,2.184)
PH1X4_2D54
  rect 1.52x1.52 hole 1.02: 1(0,0)
  round 1.52 hole 1.02: 2(2.54,0) 3(5.08,0) 4(7.62,0)
QFN020R_P050_040X0030_T026X016
  rect 0.28x0.65 smd: 1(-1.25,-1.425) 2(-0.75,-1.425) 3(-0.25,-1.425) 4(0.25,-1.425) 5(0.75,-1.425) 6(1.25,-1.425) 11(1.25,1.425) 12(0.75,1.425) 13(0.25,1.425) 14(-0.25,1.425) 15(-0.75,1.425) 16(-1.25,1.425)
  rect 0.65x0.28 smd: 7(1.925,-0.75) 8(1.925,-0.25) 9(1.925,0.25) 10(1.925,0.75) 17(-1.925,0.75) 18(-1.925,0.25) 19(-1.925,-0.25) 20(-1.925,-0.75)
  rect 2.7x1.7 smd: 21(0,0)
QFN76P_P0D4_W9X9
  oval 0.203x1.016 smd: 1(-3.65,-4.45) 2(-3.25,-4.45) 3(-2.85,-4.45) 4(-2.45,-4.45) 5(-2.05,-4.45) 6(-1.65,-4.45) 7(-1.25,-4.45) 8(-0.85,-4.45) 9(-0.45,-4.45) 10(-0.05,-4.45) 11(0.35,-4.45) 12(0.75,-4.45) 13(1.15,-4.45) 14(1.55,-4.45) 15(1.95,-4.45) 16(2.35,-4.45) 17(2.75,-4.45) 18(3.15,-4.45) 19(3.55,-4.45) 39(3.55,4.45) 40(3.15,4.45) 41(2.75,4.45) 42(2.35,4.45) 43(1.95,4.45) 44(1.55,4.45) 45(1.15,4.45) 46(0.75,4.45) 47(0.35,4.45) 48(-0.05,4.45) 49(-0.45,4.45) 50(-0.85,4.45) 51(-1.25,4.45) 52(-1.65,4.45) 53(-2.05,4.45) 54(-2.45,4.45) 55(-2.85,4.45) 56(-3.25,4.45) 57(-3.65,4.45)
  oval 1.016x0.203 smd: 20(4.45,-3.6) 21(4.45,-3.2) 22(4.45,-2.8) 23(4.45,-2.4) 24(4.45,-2) 25(4.45,-1.6) 26(4.45,-1.2) 27(4.45,-0.8) 28(4.45,-0.4) 29(4.45,0) 30(4.45,0.4) 31(4.45,0.8) 32(4.45,1.2) 33(4.45,1.6) 34(4.45,2) 35(4.45,2.4) 36(4.45,2.8) 37(4.45,3.2) 38(4.45,3.6) 58(-4.45,3.6) 59(-4.45,3.2) 60(-4.45,2.8) 61(-4.45,2.4) 62(-4.45,2) 63(-4.45,1.6) 64(-4.45,1.2) 65(-4.45,0.8) 66(-4.45,0.4) 67(-4.45,0) 68(-4.45,-0.4) 69(-4.45,-0.8) 70(-4.45,-1.2) 71(-4.45,-1.6) 72(-4.45,-2) 73(-4.45,-2.4) 74(-4.45,-2.8) 75(-4.45,-3.2) 76(-4.45,-3.6)
  round 2.2 hole 2: 77(0,0)
R0402
  rect 0.508x0.635 smd: 1(-0.5,0) 2(0.5,0)
RJ45_14X21_H21
  round 3.35 hole 3.35 unplated: (-5.715,0) (5.715,0)
  rect 1.508x1.508 hole 1: 1(5.715,-8.89)
  round 1.508 hole 1: 2(4.445,-6.35) 3(3.175,-8.89) 4(1.905,-6.35) 5(0.635,-8.89) 6(-0.635,-6.35) 7(-1.905,-8.89) 8(-3.175,-6.35) 9(-4.445,-8.89) 10(-5.715,-6.35) 12(3.175,-2.56) 13(-3.175,-2.56)
  round 1.408 hole 0.9: 11(5.715,-3.83) 14(-5.715,-3.83)
  oval 1.68x2.52 hole 1.12x1.96: 15(6.64,4.48) 16(4.1,4.48) 17(-4.1,4.48) 18(-6.64,4.48)
  oval 2.45x2.35 hole 1.805x1.7: S1(7.797,-3.05) S2(-7.797,-3.05)
SATA_22P_SMD_H6_H9
  round 0.05 hole 1.3 unplated: (-18.875,0.375)
  round 0.05 hole 0.9 unplated: (18.875,0.375)
  rect 2.6x3 smd: H1(21.85,0.2) H2(-21.85,0.2)
  rect 0.7x3.4 smd: P1(1.905,-0.925) P2(0.635,-0.925) P3(-0.635,-0.925) P4(-1.905,-0.925) P5(-3.175,-0.925) P6(-4.445,-0.925) P7(-5.715,-0.925) P8(-6.985,-0.925) P9(-8.255,-0.925) P10(-9.525,-0.925) P11(-10.795,-0.925) P12(-12.065,-0.925) P13(-13.335,-0.925) P14(-14.605,-0.925) P15(-15.875,-0.925) S1(15.875,-0.925) S2(14.605,-0.925) S3(13.335,-0.925) S4(12.065,-0.925) S5(10.795,-0.925) S6(9.525,-0.925) S7(8.255,-0.925)
SC0402
  rect 0.508x0.508 smd: 1(-0.406,0) 2(0.406,0)
SC0402-BGA
  custom 0.475x0.51 smd: 1(-0.47,0) 2(0.47,0)
SC0603
  rect 0.762x0.813 smd: 1(-0.699,0) 2(0.699,0)
SC0805
  rect 0.991x1.27 smd: 1(-0.813,0) 2(0.813,0)
SC0805B
  rect 0.991x1.27 smd: 1(-0.813,0) 2(0.813,0)
SC1206
  rect 1.295x1.651 smd: 1(-1.346,0) 2(1.346,0)
SL0402
  rect 0.483x0.508 smd: 1(-0.394,0) 2(0.394,0)
SL0805
  rect 0.94x1.27 smd: 1(-0.851,0) 2(0.851,0)
SMA1
  rect 2.286x2.032 smd: 1(-2.043,0) 2(1.992,0)
SO8EP_P1D27_W4
  rect 1.505x0.802 smd: 1(-2.498,1.905) 2(-2.498,0.635) 3(-2.498,-0.635) 4(-2.498,-1.905) 5(2.498,-1.905) 6(2.498,-0.635) 7(2.498,0.635) 8(2.498,1.905)
  rect 2.613x3.502 smd: 9(0,0)
SOP8_P1D25_W5
  rect 0.61x1.524 smd: 1(-1.905,-2.794) 2(-0.635,-2.794) 3(0.635,-2.794) 4(1.905,-2.794) 5(1.905,2.794) 6(0.635,2.794) 7(-0.635,2.794) 8(-1.905,2.794)
SOT23
  rect 0.914x0.914 smd: 1(-0.953,-0.991) 2(0.953,-0.991)
  rect 0.914x1.27 smd: 3(0,1.041)
SOT23-6L
  rect 0.635x1.27 smd: 1(-0.95,-1.2) 2(0,-1.2) 3(0.95,-1.2) 4(0.95,1.2) 5(0,1.2) 6(-0.95,1.2)
SOT23-6L-KTB
  rect 0.635x1.27 smd: 1(-0.95,-1.2) 2(0,-1.2) 3(0.95,-1.2) 4(0.95,1.2) 5(0,1.2) 6(-0.95,1.2)
SOT23_5
  rect 0.635x1.27 smd: 1(-0.95,-1.3) 2(-0.01,-1.3) 3(0.929,-1.3) 4(0.929,1.3) 5(-0.95,1.3)
SOT353
  rect 0.6x0.42 smd: 1(0.95,-0.65) 2(0.95,0) 3(0.95,0.65) 4(-0.95,0.65) 5(-0.95,-0.65)
SPL0707G
  rect 2.489x3.404 smd: 1(-3.095,0) 2(3.095,0)
SR0402
  rect 0.508x0.508 smd: 1(-0.406,0) 2(0.406,0)
SW_4P-DTSA6
  round 1.52 hole 1.02: 1(-2.25,-2.5) 2(2.25,-2.5)
  round 1.803 hole 1.397: 3(-3.5,0) 4(3.5,0)
SWIC_4P_1D27_6D7X8_H2D3
  rect 0.76x1.27 smd: 1(-1.905,-3.81) 2(-0.635,-3.81) 3(0.635,-3.81) 4(1.905,-3.81) 5(1.905,3.81) 6(0.635,3.81) 7(-0.635,3.81) 8(-1.905,3.81)
SWPA4030S
  rect 1.118x3.708 smd: 1(-1.5,0) 2(1.5,0)
TF_CARD-MISOSD
  round 1.016 hole 1.016 unplated: (-4.95,0) (3.05,0)
  rect 0.711x1.651 smd: 1(2.25,10.5) 2(1.15,10.5) 3(0.05,10.5) 4(-1.05,10.5) 5(-2.15,10.5) 6(-3.25,10.5) 7(-4.35,10.5) 8(-5.45,10.5) 12(-6.55,10.5)
  rect 1.27x2.286 smd: 9(-7.75,0.4) 13(7.75,0.4)
  rect 1.219x1.397 smd: 10(-7.75,10)
  rect 1.651x1.397 smd: 11(6.85,10)
TH_8_120_S
  round 3.048 hole 3.048 unplated: (0,0)
  round 1.016 hole 0.508: 1(0.002,2.578) 2(-1.821,1.821) 3(-2.576,0) 4(-1.821,-1.824) 5(0.002,-2.578) 6(1.824,-1.824) 7(2.581,0) 8(1.824,1.819)
TP_40
  round 0.762 smd: 1(0,0)
TSOT23-8
  rect 0.381x1.194 smd: 1(-0.975,-1.3) 2(-0.325,-1.3) 3(0.325,-1.3) 4(0.975,-1.3) 5(0.975,1.3) 6(0.325,1.3) 7(-0.325,1.3) 8(-0.975,1.3)
TSSOP8_P0D65_W3
  oval 0.45x1.9 smd: 1(-0.975,-2.25) 2(-0.325,-2.25) 3(0.325,-2.25) 4(0.975,-2.25) 5(0.975,2.25) 6(0.325,2.25) 7(-0.325,2.25) 8(-0.975,2.25)
unnamed
  round 1.016 smd: 1(0,0)
USB2_0
  round 1.346 hole 0.9: 1(2.7,0) 2(2.7,-2.499) 3(2.7,-4.501) 4(2.7,-7) 6(0,-2.499) 7(0,-4.501) 8(0,-7)
  rect 1.346x1.346 hole 0.9: 5(0,0)
  round 3.048 hole 2.3: 9(-2.63,3.071) 10(3.059,3.071) 11(3.059,-10.061) 12(-2.63,-10.061)
USON10_P0D5_W0D9
  rect 0.2x0.565 smd: 1(-1,-0.417) 2(-0.5,-0.417) 4(0.5,-0.417) 5(1,-0.417) 6(1,0.417) 7(0.5,0.417) 9(-0.5,0.417) 10(-1,0.417)
  rect 0.4x0.565 smd: 3(0,-0.417) 8(0,0.417)
WAFER_1X4_2D54_TH
  round 0.05 hole 1.25 unplated: (-1.27,-2.16)
  round 1.4 hole 1.02: 1(-3.81,0) 2(-1.27,0) 3(1.27,0) 4(3.81,0)

## Nets
5V0: C20.1 C21.1 C22.1 C23.1 C24.1 C31.1 C32.1 C33.1 C40.1 C41.1 C42.1 C49.1 C50.1 C51.1 C59.1 C60.1 C413.1 C414.1 C417.1 C418.1 D13.2 D18.1 L2.2 L6.1 LB3.1 LB16.1 LB18.1 R11.1 R14.1 R18.1 R22.1 R112.2 R113.2 T2.1 U5.2 U6.2 U7.2 U8.77 U8.79 U8.81 U8.83 U8.85 U8.87 U10.5 U11.5
5V0_HDMI: C137.1 C138.1 C139.1 C140.1 J5.18 L6.2 U26.5
12V0: C13.1 C14.1 C15.1 C25.1 C26.1 C27.1 C70.1 C71.1 C157.1 C420.1 C428.1 C429.1 C430.1 C434.1 C435.1 C436.1 C440.1 C441.1 C442.1 LB4.1 R5.1 R9.1 R107.1 U3.2 U4.2 U20.P13 U20.P14 U20.P15 U21.P13 U21.P14 U21.P15 U22.P13 U22.P14 U22.P15 U23.P13 U23.P14 U23.P15 U32.4 U32.5 U32.6 U32.7 U32.8
GND: C9.2 C10.2 C11.2 C12.2 C13.2 C14.2 C15.2 C16.2 C17.2 C18.2 C21.2 C22.2 C23.2 C24.2 C25.2 C26.2 C27.2 C28.2 C29.2 C30.2 C31.2 C32.2 C33.2 C34.2 C35.2 C37.2 C38.2 C39.2 C40.2 C41.2 C42.2 C43.2 C44.2 C46.2 C47.2 C48.2 C49.2 C50.2 C51.2 C52.2 C53.2 C55.2 C56.2 C57.2 C58.2 C59.2 C60.2 C63.2 C64.2 C65.2 C66.2 C67.2 C68.2(TP-2) C69.2(TP-2) C70.2 C71.2 C73.2 C74.2 C76.2 C77.2 C78.2 C79.2 C80.2 C90.2 C91.2 C92.2 C93.2 C94.2 C95.2 C96.2 C97.2 C98.2 C99.2 C100.2 C101.2 C102.2 C103.2 C104.2 C105.2 C114.2 C115.2 C116.2 C117.2 C120.2 C121.2 C122.2 C123.2 C124.2 C125.2 C126.2 C127.2 C128.2 C129.2 C130.2 C131.2 C132.2 C133.2 C134.1 C135.2 C136.1 C137.2 C138.2 C139.2 C140.2 C141.2 C142.2 C144.2 C145.2 C146.2 C147.2 C148.1 C150.2 C151.2 C152.2 C153.2 C157.2 C158.2 C159.2 C160.2 C161.2 C162.2 C163.2 C164.2 C165.2 C413.2 C414.2 C416.2 C417.2 C418.2 C420.2 C422.2 C428.2 C429.2 C430.2 C431.2 C432.2 C433.2 C434.2 C435.2 C436.2 C437.2 C438.2 C439.2 C440.2 C441.2 C442.2 C443.2 C444.2 C445.2 C448.2 C451.2 C454.2 D17.1 J2.2 J2.3 J3.6 J3.9 J3.10 J3.11 J3.13 J4.1 J5.2 J5.5 J5.8 J5.11 J5.17 J5.20 J5.21 J5.22 J5.23 R7.2 R13.2 R17.2 R21.2 R25.2 R26.1 R27.1 R37.1 R38.1 R39.1 R40.1 R44.2 R51.2 R58.2 R61.2 R73.2 R75.2 R76.1 R79.2 R80.2 R91.1 R99.2 R101.2 R104.2 R105.2 R106.2 R108.1 T11.1 U3.7 U3.9 U4.7 U4.9 U5.4 U5.6 U6.4 U6.6 U7.4 U7.6 U8.1 U8.2 U8.7 U8.8 U8.13 U8.14 U8.22 U8.23 U8.32 U8.33 U8.42 U8.43 U8.52 U8.53 U8.59 U8.60 U8.65 U8.66 U8.71 U8.74 U8.98 U8.107 U8.108 U8.113 U8.114 U8.119 U8.120 U8.125 U8.126 U8.131 U8.132 U8.137 U8.138 U8.144 U8.150 U8.155 U8.156 U8.161 U8.162 U8.167 U8.168 U8.173 U8.174 U8.179 U8.180 U8.185 U8.186 U8.191 U8.192 U8.197 U8.198 U9.3 U10.3 U11.3 U12.3 U12.8 U13.3 U13.8 U14.2 U15.2 U16.2 U18.4 U19.4 U20.H1 U20.H2 U20.P4 U20.P5 U20.P6 U20.P10 U20.P12 U20.S1 U20.S4 U20.S7 U21.H1 U21.H2 U21.P4 U21.P5 U21.P6 U21.P10 U21.P12 U21.S1 U21.S4 U21.S7 U22.H1 U22.H2 U22.P4 U22.P5 U22.P6 U22.P10 U22.P12 U22.S1 U22.S4 U22.S7 U23.H1 U23.H2 U23.P4 U23.P5 U23.P6 U23.P10 U23.P12 U23.S1 U23.S4 U23.S7 U24.8 U24.29 U24.45 U24.56 U24.77 U25.4 U26.2 U27.2 U28.2 U29.5 U30.4 U30.8 U30.9 U30.10 U30.11 U30.12 U31.S1 U31.S2 U32.16 U32.21 U33.2 U33.3 U33.4 U107.2 U111.2 U111.3 U111.4 U111.5 U111.6 U112.2 X2.2 X2.4
VBUS1: R77.1 U30.1
VBUS_5V: C144.1 C145.1 Q1.3 R75.1 U30.5
VDD_DC_12V_IN: D16.1 D17.2 J2.1 U111.1
BT_NDIS: SW1.5 U8.91
CEC_A: J5.13 R69.2
CM4_GPIO6: U8.30
CM4_GPIO13: R111.1 U8.28
CM4_GPIO19: U8.26
CM4_GPIO26: U8.24
D1N: U29.8 U30.2
D1P: U29.9 U30.3
D2N: U29.6 U30.6
D2P: U29.7 U30.7
DC_DMODE: R99.1 R100.2 U32.1
DC_EN_UVLO: R102.1 R103.2 U32.14
DC_ILIM: R105.1 U32.17
DC_IMON: R104.1 U32.19
DC_OVP_SET: R101.1 R102.2 U32.15
DC_PGTH: R106.1 R107.2 U32.3
DC_SOFTSTART: C153.1 U32.18
DCJACK_SNUB: C151.1 R98.2
ETH_EEPROM_NWP: SW1.8 U8.20
ETH_LEDG: R93.2 U8.15
ETH_LEDY: R94.2 U8.17
ETH_SYNC_IN: R26.2 U8.16
ETH_SYNC_OUT: R27.2 U8.18
GLOBAL_EN: R36.2 U10.4 U11.4
GPIO1: R59.1 U24.69
GPIO2: R60.1 U24.70
GPIO3: R62.1 U24.18
GPIO4: R63.1 U24.20
HDMI0_CEC: R69.1 R72.2 U8.151 U26.3
HDMI0_CLK_N: J5.12 U8.190 U28.3
HDMI0_CLK_P: J5.10 U8.188 U28.4
HDMI0_HOTPLUG: C141.1 J5.19 R73.1 U8.153 U26.6
HDMI0_SCL: J5.15 R70.1 U8.200 U26.1
HDMI0_SDA: J5.16 R71.1 U8.199 U26.4
HDMI0_TX0_N: J5.9 U8.184 U28.5
HDMI0_TX0_P: J5.7 U8.182 U28.1
HDMI0_TX1_N: J5.6 U8.178 U27.3
HDMI0_TX1_P: J5.4 U8.176 U27.4
HDMI0_TX2_N: J5.3 U8.172 U27.5
HDMI0_TX2_P: J5.1 U8.170 U27.1
ID_SC: R83.1 T12.1 U8.35
ID_SD: R84.1 T13.1 U8.36
NRPIBOOT: SW1.7 U8.93
NRTC_INT: C166.1 R112.1 U18.3
PCIE_CLK_N: U8.112 U24.59
PCIE_CLK_NREQ: T14.1 U8.102
PCIE_CLK_P: U8.110 U24.58
PCIE_NRST: R85.2 U8.109
PCIE_RX_N: C119.2 U8.118
PCIE_RX_P: C118.2 U8.116
PCIE_TX_N: U8.124 U24.54
PCIE_TX_P: U8.122 U24.55
PI_LED_NPWR: U8.95 U9.2
PI_NLED: R28.1 U8.21
RUN_PG: R31.1 R109.1 U10.2
RXN_0: C85.1 U24.31
RXN_1: C84.1 U24.25
RXN_2: C108.1 U24.10
RXN_3: C109.1 U24.4
RXP_0: C83.1 U24.30
RXP_1: C82.1 U24.24
RXP_2: C106.1 U24.9
RXP_3: C107.1 U24.3
SATA_5V0: C8.1 C9.1 C10.1 C11.1 C12.1 C73.1 C74.1 C416.1 C422.1 C431.1 C432.1 C433.1 C437.1 C438.1 C439.1 C443.1 C444.1 C445.1 D15.1 L1.2 R4.1 T1.1 U20.P7 U20.P8 U20.P9 U21.P7 U21.P8 U21.P9 U22.P7 U22.P8 U22.P9 U23.P7 U23.P8 U23.P9
SATA_AVDD0: C114.1 C115.1 C116.1 C117.1 LB13.2 U24.53
SATA_VAA1: C102.1 C103.1 C104.1 C105.1 LB12.2 U24.39
SATA_VAA2_0: C76.1 C77.1 C78.1 C79.1 LB6.2 U24.32
SATA_VAA2_1: C90.1 C91.1 C92.1 C93.1 LB9.2 U24.26
SATA_VAA2_2: C94.1 C95.1 C96.1 C97.1 LB10.2 U24.11
SATA_VAA2_3: C98.1 C99.1 C100.1 C101.1 LB11.2 U24.5
SATA_VDD_1V0: C34.1 C35.1 C37.1 C38.1 L3.2 LB14.1 R15.1 T3.1 U5.5
SATA_VDD_1V0_IN: C120.1 C121.1 C122.1 C123.1 C124.1 C125.1 C126.1 C127.1 C128.1 C129.1 LB14.2 U24.1 U24.19 U24.23 U24.36 U24.44 U24.62 U24.71
SATA_VDD_1V8: C43.1 C44.1 C46.1 C47.1 L4.2 LB1.1 LB6.1 LB9.1 LB10.1 LB11.1 LB12.1 LB13.1 R19.1 R29.1 T4.1 U6.5
SATA_VDD_3V3: C52.1 C53.1 C55.1 C56.1 C58.1 C63.1 C69.1(TP-1) C80.1 C448.1 C451.1 C454.1 D5.1 D6.1 D8.2 D14.2 L5.2 LB2.1 LB15.1 LB17.1 R23.1 R30.1 R44.1 R45.1 R52.1 R56.1 R110.2 T5.1 U7.5 U9.5 U14.5 U19.3 U20.P1 U20.P2 U20.P3 U21.P1 U21.P2 U21.P3 U22.P1 U22.P2 U22.P3 U23.P1 U23.P2 U23.P3 U31.15 U31.17 U107.1
SATA_VDDIO_3V3: C130.1 C131.1 C132.1 C133.1 C135.1 D9.1 D10.1 D11.1 D12.1 LB15.2 R57.2 R65.1 R66.1 R67.1 U24.16 U24.68 U25.8
SCL0: R81.1 U8.80
SCL01: R54.2 R81.2 R83.2 U18.6 U19.2
SD_CLK: J3.5 U8.57 U15.3
SD_CMD: J3.3 R50.2 U8.62 U16.6
SD_DAT0: J3.7 R48.2 U8.63 U15.1
SD_DAT1: J3.8 R49.2 U8.67 U15.4
SD_DAT2: J3.1 R46.2 U8.69 U16.3
SD_DAT3: J3.2 R47.2 U8.61 U16.4
SD_DET: J3.12 R52.2 U8.76 U15.6
SD_PWR_ON: R45.2 U8.75 U14.4
SDA0: R82.1 U8.82
SDA01: R55.2 R82.2 R84.2 U18.5 U19.1
SDIO0_VDD_3.3V: C64.1 C65.1 J3.4 R46.1 R47.1 R48.1 R49.1 R50.1 R51.1 U14.1 U15.5 U16.5
SNN_DC_FLT: U32.20
SNN_DC_PGOOD: TP4.1 U32.2
SPI_CLK: U24.17 U25.6
SPI_CS: R65.2 U24.14 U25.1
SPI_DI: U24.2 U25.5
SPI_DO: U24.15 U25.2
SPI_HOLD: R67.2 U25.7
SPI_WP: R66.2 U25.3
TRD0_N: U8.10 U12.2 U12.9 U31.2
TRD0_P: U8.12 U12.1 U12.10 U31.1
TRD1_N: U8.6 U12.5 U12.6 U31.6
TRD1_P: U8.4 U12.4 U12.7 U31.3
TRD2_N: U8.9 U13.2 U13.9 U31.8
TRD2_P: U8.11 U13.1 U13.10 U31.7
TRD3_N: U8.5 U13.5 U13.6 U31.10
TRD3_P: U8.3 U13.4 U13.7 U31.9
TV_OUT: T10.1 U8.111
TXN_0: C87.1 U24.33
TXN_1: C86.1 U24.27
TXN_2: C110.1 U24.12
TXN_3: C111.1 U24.6
TXP_0: C89.1 U24.34
TXP_1: C88.1 U24.28
TXP_2: C112.1 U24.13
TXP_3: C113.1 U24.7
UART1_RXD: U8.51 U107.3
UART1_TXD: U8.55 U107.4
USB_N: U8.103 U29.4
USB_OTG_ID: R78.1 U8.101
USB_P: U8.105 U29.3
WAKE_N: R57.1 U24.60
WL_NDIS: SW1.6 U8.89
XIN: C134.2 R64.1 U24.40 X2.1
XOUT: R64.2 R68.2 U24.41
N07955: D14.1 R72.1
N07959: C142.1 D13.1 R70.2 R71.2
N7911999: L3.1 U5.3
N7912105: R16.1 U5.7
N7912117: R15.2 R16.2 R17.1
N7912157: C39.1 R14.2 U5.8
N16794489: C143.1 LB16.2 Q1.2 R74.1
N16794497: C143.2 Q1.1 R74.2 R76.2
N16927936: C20.2 R10.2 R11.2 R13.1
N16928137: L2.1 R8.2 U4.8
N16928143: R9.2 U4.3
N16928145: C28.1 U4.4
N16928182: R10.1 U4.5
N17238107: C19.2 U4.1
N17238112: C19.1 R8.1
N17238622: C30.1 R12.1
N17238625: C29.1 R12.2 U4.6
N17242553: C7.2 U3.1
N17242564: C7.1 R2.1
N17242568: L1.1 R2.2 U3.8
N17242614: C8.2 R3.2 R4.2 R7.1
N17242622: C18.1 R6.1
N17242629: C17.1 R6.2 U3.6
N17242750: R5.2 U3.3
N17242752: C16.1 U3.4
N17242766: R3.1 U3.5
N17243971: L4.1 U6.3
N17243973: R20.1 U6.7
N17243979: R19.2 R20.2 R21.1
N17243985: C48.1 R18.2 U6.8
N17245307: L5.1 U7.3
N17245309: R24.1 U7.7
N17245315: R23.2 R24.2 R25.1
N17245321: C57.1 R22.2 U7.8
N17247969: D5.2 R28.2
N17257260: R29.2 R30.2 U8.78
N17257480: LB1.2 U8.84 U8.86
N17257492: LB2.2 U8.88 U8.90
N17257565: R35.2 U8.100
N17257577: R35.1 T8.1
N17257602: R34.2 U8.96
N17257614: R34.1 T7.1
N17257643: R33.2 U8.94
N17257694: R33.1 T6.1
N17259132: D6.2 R32.2
N17259209: R32.1 U9.4
N17259601: R31.2 U8.92
N17260102: R36.1 U8.99
N17272815: C136.2 R68.1 X2.3
N17273479: C118.1 U24.52
N17273481: C119.1 U24.51
N17273564: R85.1 U24.61
N17276170: R61.1 U24.22
N17278927: C88.2 U21.S2
N17278965: C86.2 U21.S3
N17279014: C82.2 U21.S6
N17279017: C84.2 U21.S5
N17279139: C89.2 U20.S2
N17279149: C87.2 U20.S3
N17279167: C83.2 U20.S6
N17279169: C85.2 U20.S5
N17279395: C112.2 U22.S2
N17279405: C110.2 U22.S3
N17279423: C106.2 U22.S6
N17279425: C108.2 U22.S5
N17279547: C113.2 U23.S2
N17279557: C111.2 U23.S3
N17279575: C107.2 U23.S6
N17279577: C109.2 U23.S5
N17281746: D9.2 R59.2
N17281831: D10.2 R60.2
N17281911: D11.2 R62.2
N17289491: D12.2 R63.2
N17290822: R58.1 U24.42
N17292854: R77.2 R78.2 R79.1 U29.2
N17293316: R80.1 U29.10
N17293450: C146.1 C147.1 LB17.2 LB18.2 U29.1
N17293990: R37.2 SW1.1
N17294164: R38.2 SW1.2
N17294184: R39.2 SW1.3
N17294204: R40.2 SW1.4
N17299606: C67.1 U18.2 X1.2
N17299614: C66.1 U18.1 X1.1
N17299630: D8.1 R53.1
N17299632: C68.1(TP-1) R53.2 R54.1 R55.1 U18.8 U112.1
N17302148: J4.2 LB3.2 LB4.2
N17302166: J4.3 R56.2 U19.6
N17302175: J4.4 U19.5
N17367673: D15.2 R91.2
N17379871: C148.2 U31.4 U31.5
N17380035: R93.1 U31.16
N17380125: R94.1 U31.18
N17406478: C150.1 C152.1 D16.2 R98.1 R100.1 R103.1 U32.9 U32.10 U32.11 U32.12 U32.13
N17412567: C158.1 C165.1 H2.1 H2.2 H2.3 H2.4 H2.5 H2.6 H2.7 H2.8
N17412587: C159.1 C160.1 H1.1 H1.2 H1.3 H1.4 H1.5 H1.6 H1.7 H1.8
N17412653: C161.1 C162.1 H3.1 H3.2 H3.3 H3.4 H3.5 H3.6 H3.7 H3.8
N17412663: C163.1 C164.1 H4.1 H4.2 H4.3 H4.4 H4.5 H4.6 H4.7 H4.8
N17413874: D18.2 R108.2
N17414261: R109.2 R110.1 R111.2 U33.1
N17414590: C166.2 R113.1 U11.2

Pads without a net: J2 4; J5 14; NOREF 1; NOREF#4 1; NOREF#9 1; NOREF#10 1; NOREF#11 1; NOREF#12 1; NOREF#13 1; NOREF#14 1; U5 1; U6 1; U7 1; U8 19 25 27 29 31 34 37 38 39 40 41 44 45 46 47 48 49 50 54 56 58 64 68 70 72 73 97 104 106 115 117 121 123 127 128 129 130 133 134 135 136 139 140 141 142 143 145 146 147 148 149 152 154 157 158 159 160 163 164 165 166 169 171 175 177 181 183 187 189 193 194 195 196 201 202 203 204; U9 1; U10 1; U11 1; U14 3; U16 1; U18 7; U19 7 8; U20 P11; U21 P11; U22 P11; U23 P11; U24 21 35 37 38 43 46 47 48 49 50 57 63 64 65 66 67 72 73 74 75 76; U31 11 12 13 14

## Via types
v1: diameter 0.508, hole 0.254, TOP to BOTTOM, 1088 vias

## Routing (per net, layer and track width the routed paths; a pad name or vN(x,y) marks a point on that pad's centre or on a via; arc(x,y) is an arc through that point)
5V0: length 70.6
  TOP w0.381: U11.5 38.64,75.54 C60.1 39.37,74.93 38.51,74.07 v1(36.86,74.07)
  TOP w0.508: D18.1 98.3,36.04 v1(98.86,36.04) ; v1(91.31,58.29) 91.31,75.44 v1(90.04,76.71) ; R112.2 37.57,79.25 R113.2 36.53,79.15 35.69,78.31 v1(35.69,72.9) 34.37,71.58 34.19,71.58 ; v1(13.59,87) 9.66,87 LB3.1 ; v1(45.75,22) 45.53,22.21 LB18.1 ; v1(53.09,12.06) L6.1 v1(54.1,13.12) ; D13.2 v1(55.07,19.81) ; 34.19,71.58 v1(30.86,71.58) ; 34.19,71.58 C59.1 34.19,69 U10.5
  BOTTOM w0.508: R22.1 90.32,92.68 92.28,90.73 92.28,86.74 ; v1(36.86,74.07) v1(35.69,72.9) ; R11.1 C20.1 v1(91.31,58.29) ; R14.1 24.49,88.39 22.1,86 ; 70.48,90.04 71.25,90.81 R18.1
  vias: v1(15.88,87.12) v1(15.88,86.23) v1(17.02,87.12) v1(17.02,86.23) v1(18.41,87.12) v1(18.41,86.23) v1(19.68,87.12) v1(19.68,86.23) v1(28.32,98.17) v1(29.46,98.17) v1(30.73,98.17) v1(47.29,20.83) v1(47.83,21.46) v1(47.88,20.12) v1(48.82,20.12) v1(89.03,76.71) v1(89.28,83.82) v1(90.17,82.93) v1(90.3,81.03) v1(90.3,80.14) v1(90.3,79.25) v1(91.19,84.2) v1(91.31,78.99) v1(92.46,78.99) v1(93.22,78.23) v1(93.34,83.69) v1(93.34,82.68) v1(93.34,81.53)
5V0_HDMI: length 6.2
  TOP w0.254: J5.18 59.25,11.37
  TOP w0.508: 59.25,11.37 59.25,11.62 v1(58.8,12.07)
  BOTTOM w0.508: v1(56.64,14.48) 58.8,12.32 v1(58.8,12.07)
12V0: length 58.9
  TOP w1.016: 9.02,83.44 8.38,83.44 6.1,81.15 6.1,71.37 3.56,68.83 3.56,59.31 2.41,58.17 v1(2.41,50.42) v1(2.41,48.64)
  BOTTOM w0.508: v1(97.92,62.48) 97.69,62.26 R9.1 97.16,63.12 v1(97.16,63.12) v1(97.16,63.75) C27.1 v1(97.79,64.49)
  BOTTOM w1.016: v1(2.41,50.42) v1(2.41,48.64) 2.41,47.62 8.13,41.91 v1(8.13,36.58) v1(8.13,35.56)
  vias: v1(20.22,36.88) v1(20.24,35.64) v1(20.83,36.2) v1(20.83,35.05) v1(21.31,36.86) v1(21.36,35.64) v1(30.86,29.08) v1(31.5,28.45) v1(32.13,27.81) v1(32.89,31.37) v1(34.92,30.1) v1(36.07,31.5) v1(54.99,27.56) v1(56.13,27.56) v1(57.15,27.56) v1(58.29,27.56) v1(58.93,27.05) v1(72.01,24.38) v1(72.01,23.24) v1(72.01,22.23) v1(72.01,21.08) v1(75.06,24.51) v1(75.06,23.24) v1(75.06,22.23) v1(75.06,20.95) v1(76.07,24.51) v1(76.07,23.24) v1(76.07,22.23) v1(76.07,20.95) v1(88.14,30.35) v1(88.14,29.59) v1(88.14,28.83) v1(88.14,28.19) v1(89.03,35.43) v1(89.03,34.54) v1(92.33,34.42) v1(92.58,56.31) v1(92.71,36.07) v1(92.71,35.05) v1(93.47,35.56) v1(93.47,34.54) v1(93.6,55.12) v1(93.6,53.85) v1(94.49,56.41) v1(95,55.12) v1(95,53.85) v1(97.79,63.5)
GND: length 315.3
  TOP w0.203: v1(64.49,14.91) 64.26,14.68 U28.2 ; U27.2 66.93,14.55 v1(66.95,14.58)
  TOP w0.254: U29.5 40.74,21.23 v1(40.89,21.08) ; J5.5 v1(65.75,7.58) ; J5.17 59.75,10.85 v1(59.94,11.05) ; U32.16 79.61,26.14 v1(79.25,25.78) ; J5.8 v1(64.25,7.58) ; J5.11 v1(62.75,7.58) ; J5.2 v1(67.25,7.58)
  TOP w0.305: U13.3 v1(23.62,20.9) ; U13.8 v1(23.62,23.19)
  TOP w0.381: C97.2 49.96,95.07 v1(49.96,95.4) ; U10.3 v1(32.96,66.37) ; v1(15.88,21.11) U12.3 U12.8 v1(15.88,23.55) ; U19.4 v1(12.99,92.84) ; U11.3 v1(36.93,76.25)
  TOP w0.508: v1(96.77,35.97) 96.77,35.71 R108.1 ; C91.2 v1(55.37,91.92) ; v1(78.33,83.26) 78.38,83.21 C65.2 R51.2 v1(78.38,80.67) ; C104.2 52.07,82.07 v1(51.61,82.07) ; v1(53.98,91.85) 54.36,91.47 C92.2 ; v1(37.38,40.98) U22.P10 41.69,40.98 v1(41.91,40.77) ; U20.S4 v1(82.97,62.57) ; v1(82.68,38.99) 83.22,38.44 U20.P12 v1(87.59,38.44) ; v1(46.46,95.3) 46.46,94.79 C101.2 ; v1(56.13,12.19) 56.64,12.7 C137.2 ; C147.2 v1(44.32,26.29) ; v1(6.35,45.34) 5.84,45.85 R37.1 ; U22.S7 v1(42.04,58.76) ; U21.S4 v1(60.33,62.57) ; v1(64.8,40.64) 64.45,40.98 U21.P10 60.64,40.98 v1(60.2,41.43) ; v1(96.52,29.08) 96.77,28.83 C58.2 ; J3.6 v1(79.45,84.2) ; v1(74.93,26.42) 75.3,26.79 R106.2 ; J3.10 v1(83.95,84.71) ; C59.2 v1(32.59,69.47) ; v1(33.79,43.86) 33.98,43.86 R26.1 ; v1(56.64,17.53) C140.2 ; R27.1 33.73,47.14 v1(33.68,47.19) ; v1(93.04,21.84) 93.04,21.08 C9.2 92.46,21.16 v1(92.46,21.84) ; C121.2 v1(53.31,85.37) C122.2 ; C78.2 v1(56.06,87.4) C77.2 ; v1(38.57,70.48) U22.H1 37.36,71.15 v1(37.36,70.56) ; v1(50.09,81.53) 49.58,82.04 C115.2 ; v1(33.68,48.7) 33.08,48.7 T11.1 ; C128.2 50.14,83.52 v1(50.6,83.97) ; C79.2 55.55,84.56 v1(56.06,84.05) ; v1(60.45,38.61) 60.62,38.44 U21.P12 v1(64.74,38.44) ; v1(82.71,40.98) U20.P10 v1(87.72,40.98) ; U16.2 72.14,82.17 v1(71.75,81.79) ; C123.2 52.45,88.52 v1(52.7,88.27) ; C90.2 53.56,88.18 v1(53.19,87.81) 53.66,87.34 C76.2 ; v1(44.93,94.36) 45.21,94.64 C99.2 ; R76.1 v1(51.31,15.75) ; R40.1 v1(9.78,45.34) ; v1(54.15,93.75) 53.52,93.75 C131.2 ; v1(19.14,40.98) U23.P10 v1(14.52,40.98) ; C103.2 55.32,82.3 v1(55.75,82.73) ; v1(19.18,38.44) U23.P12 v1(14.61,38.44) ; R75.2 v1(44.2,19.56) ; U15.2 79.73,82.17 v1(79.43,82.47) ; U23.H2 v1(13.72,28.66) ; U21.S1 v1(60.33,66.38) ; R104.2 77.06,29.07 v1(76.71,28.73) 76.36,29.07 R99.2 ; v1(83.41,70.61) 83.41,71.48 U20.H1 v1(84.29,70.56) ; v1(37.44,38.58) 37.58,38.44 U22.P12 v1(41.91,38.44) ; v1(61.65,13.28) 61.21,13.72 U26.2 ; U20.H2 v1(82.3,28.66) ; U21.S7 v1(60.36,58.76) ; C146.2 v1(43.18,26.29) 42.9,26.29 R79.2 ; v1(61.43,70.56) U21.H1 v1(61.43,74.17) ; v1(20.9,23.32) C148.1 v1(20.9,20.83) ; C114.2 v1(49.24,83.93) ; R39.1 v1(8.51,45.34) ; C69.2 12.8,96.62 v1(12.83,96.65) ; U20.S7 83.66,58.76 v1(83.31,58.42) ; v1(96.67,32.16) 96.77,32.05 R91.1 ; C63.2 v1(87.5,87.38) ; U23.S1 v1(14.61,66.38) ; v1(83.29,25.6) 82.85,26.04 R101.2 ; U23.S4 v1(14.61,62.57) ; C116.2 v1(46.58,81.28) ; v1(50.98,90.42) 51.36,90.81 C124.2 ; C117.2 v1(46.58,84.02) ; C145.2 v1(45.21,19.56) 45.21,19.96 R80.2 ; C93.2 56.01,88.49 v1(56.21,88.7) ; C133.2 v1(53.49,94.39) ; C95.2 51.52,95 v1(52.03,94.49) 51.8,94.25 51.73,94.25 C96.2 51.46,93.15 C94.2 ; U23.H1 v1(17.69,72.36) ; U20.S1 v1(82.97,66.38) ; C60.2 v1(38.61,76.35) ; v1(33.02,34.29) 33.32,33.99 C442.2 35.38,33.99 v1(35.56,34.16) ; C153.2 v1(77.77,29.84) ; R105.2 80.01,29.74 v1(79.86,29.9) ; v1(52.63,83.92) 52.26,83.55 C102.2 ; C64.2 v1(79.18,80.72) ; v1(99.06,20.45) 98.09,20.45 C10.2 98.09,21.21 v1(99.06,21.21) ; v1(56.26,18.08) C139.2 ; v1(59.23,15.62) 59.05,15.8 C142.2 ; v1(53.34,54.23) 53.34,53.26 C451.2 53.34,52.4 v1(53.34,51.44) ; U22.S4 v1(42.04,62.57) ; C98.2 48.63,94.7 v1(48.16,95.17) C100.2 ; R38.1 v1(7.24,45.34) ; R44.2 v1(87.5,86.11) ; J3.11 v1(69.35,84.84) ; C105.2 v1(55.83,83.44) ; U22.S1 v1(42.13,66.38) ; U23.S7 v1(14.61,58.76) ; v1(56.82,37.57) 56.82,38.48 C438.2 56.08,38.1 v1(56.08,37.54) ; v1(55.12,12.19) C138.2 ; C144.2 v1(46.61,20.27)
  BOTTOM w0.152: 58.78,80.95 58.75,80.98 58.75,81.31 58.06,81.99 57.76,81.99
  BOTTOM w0.203: U8.119 v1(64.64,46.3) ; U8.150 v1(67.58,52.3) ; U8.144 v1(67.58,51.1) ; U8.107 64.74,43.9 v1(64.64,43.99) ; U8.197 v1(64.62,61.9) ; U8.191 66.05,60.7 v1(66.34,60.4) ; v1(67.61,43.69) 67.83,43.9 U8.108 ; U8.71 31.06,56.7 30.58,57.18 v1(30.43,57.18) ; v1(46.58,84.02) 46.53,83.97 U24.56 ; U8.7 30.65,43.9 v1(30.61,43.94) ; U8.185 v1(66.34,59.5) ; U8.43 30.87,51.1 v1(30.66,51.31) ; U8.22 34.17,46.7 v1(33.68,47.19) ; U8.126 v1(67.58,47.5) ; U8.23 v1(32.28,47.1) ; v1(35.31,42.9) 35.11,42.7 U8.2 ; U24.29 53.53,87.47 v1(53.19,87.81) ; U8.53 30.95,53.1 30.68,52.83 v1(30.48,52.83) ; U8.156 v1(67.58,53.5) ; v1(35.38,54.97) 35.38,55.22 35.1,55.5 U8.66 ; U8.155 v1(64.5,53.5) ; U8.125 v1(64.64,47.5) ; v1(35.36,52.7) U8.52 ; U8.180 v1(67.62,58.3) ; U8.162 v1(67.58,54.7) ; U8.59 v1(30.4,54.3) ; U8.179 v1(66.34,58.3) ; v1(30.71,45.16) 30.74,45.13 31.47,45.13 U8.13 ; v1(67.69,59.31) 67.88,59.5 U8.186 ; U8.131 v1(64.67,48.7) ; v1(67.61,45.01) 67.71,45.1 U8.114 ; v1(30.25,55.78) 30.53,55.5 U8.65 ; v1(49.28,92.84) 48.93,92.5 U24.8 ; v1(69.47,61.72) 69.29,61.9 U8.198 ; v1(69.32,60.86) 69.16,60.7 U8.192 ; U8.14 33.79,45.1 v1(33.76,45.14) ; U8.74 v1(35.43,57.1) ; v1(35.36,50.7) U8.42 ; U8.33 v1(32.28,49.1) ; U8.168 v1(67.57,55.9) ; U8.138 v1(67.58,49.9) ; U8.98 33.96,61.9 v1(33.85,61.79) ; U8.167 v1(64.5,55.9) ; U8.173 v1(64.5,57.1) ; v1(33.79,43.86) 33.83,43.9 U8.8 ; U8.1 31.45,42.65 v1(31.45,42.16) ; U8.32 v1(33.68,48.7) ; v1(50.6,83.97) 50.65,83.97 50.93,83.69 U24.45 ; v1(35.36,54.3) U8.60 ; U8.113 65.01,45.1 64.82,45.29 v1(64.64,45.29) ; U8.161 v1(64.5,54.7) ; U8.174 v1(67.59,57.1) ; U8.120 v1(67.58,46.3) ; U8.132 v1(67.58,48.7) ; U8.137 v1(64.67,49.9)
  BOTTOM w0.254: 58.78,80.95 v1(58.78,78.61) 58.83,78.55 58.83,77.83 58.57,77.57 54.84,77.57 54.58,77.83 v1(54.58,78.31) ; C136.1 52.79,79.01 v1(52.02,79.78) ; C66.2 29.11,79.76 26.67,79.76 v1(26.47,79.96) v1(26.47,82.02) 26.47,83.74 26.92,84.2 v1(27.56,84.2) v1(29.84,84.2) ; 57.76,81.99 56.26,81.99 v1(56.24,81.97) 55.65,81.97 v1(55.02,81.33)
  BOTTOM w0.381: U5.6 v1(31.57,89.51) ; C17.2 98.35,31.62 v1(98.93,32.21) ; R7.2 v1(98.88,34.82) ; v1(84.84,92.25) 85.14,91.95 85.67,91.95 U7.4 86.02,92.3 85.64,92.68 v1(85.42,92.68) ; U6.6 v1(68.76,94.94) 68.45,95.25 R21.2 ; C16.2 v1(88.27,32.92) ; U7.6 v1(86.67,93.88)
  BOTTOM w0.508: C126.2 41.91,90.17 v1(41.66,89.92) ; C136.1 v1(54.58,78.31) ; C12.2 v1(92.68,19.05) ; v1(41.61,87) 41.71,87.1 C132.2 ; C134.1 54.57,81.78 v1(55.02,81.33) ; v1(85.52,83.24) 85.7,83.41 C24.2 ; C28.2 v1(93.85,59.18) ; C135.2 53.16,96.9 v1(52.88,96.62) ; v1(56.24,81.97) 56.24,81 X2.4 ; C130.2 v1(44.3,87.1) ; C18.2 97.03,29.46 v1(96.52,29.97) U3.7 ; v1(61.85,86.18) C43.2 61.54,85.47 v1(61.82,85.47) ; v1(94.11,15.19) C11.2 v1(93.09,14.1) ; C27.2 v1(97.16,66.04) ; C67.2 v1(29.84,84.2) ; v1(86.61,80.9) 87.45,80.9 C21.2 86.94,80.14 v1(86.61,80.14) ; C39.2 v1(28.27,86.92) ; R58.2 v1(51.44,79.81) ; v1(44.88,93.52) 44.53,93.88 C129.2 ; R13.2 v1(87.88,57.66) ; v1(86.87,83.69) 86.87,83.39 C22.2 88.14,83.24 v1(88.14,83.69) ; v1(40.51,81.28) C68.2 ; C30.2 88.67,64.36 v1(88.39,64.64) ; v1(86.61,78.36) 87.2,78.36 C23.2 87.2,79.12 v1(86.61,79.12) ; X2.2 v1(58.78,78.61) ; C15.2 88.54,27.3 v1(88.27,27.3) ; C158.2 v1(91.95,13.21) ; C165.2 v1(93.34,13.21) ; C29.2 v1(87.86,62.2) ; C48.2 v1(71.27,95.55) ; v1(64.26,84.45) 63.58,84.45 C44.2 63.5,85.29 v1(64.21,85.29) ; R25.2 v1(85.6,96.37) ; U4.7 v1(89.41,63.25) ; C125.2 v1(41.66,89.03) ; v1(44.28,86.07) C120.2 43.5,86 C127.2 41.96,86 v1(41.63,86.33) ; v1(30.23,85.08) U18.4 ; R17.2 v1(35.05,87.12) ; C66.2 v1(30.48,80.49) ; R61.2 v1(57.28,90.4)
  vias: v1(0.84,67.56) v1(0.91,85.32) v1(0.91,71.37) v1(0.94,57.73) v1(0.89,24.64) v1(0.97,76.43) v1(0.97,62.71) v1(1.02,50.85) v1(1.04,40.59) v1(1.12,80.49) v1(1.07,46.94) v1(1.14,37.85) v1(1.09,34.77) v1(1.14,32.13) v1(1.17,95.96) v1(1.19,90.93) v1(1.32,87.22) v1(1.4,92.61) v1(1.55,29.34) v1(1.8,89.28) v1(1.8,20.73) v1(1.8,15.29) v1(2.03,13.21) v1(2.06,83.16) v1(2.29,74.85) v1(2.67,87.76) v1(2.84,98.93) v1(3.25,18.8) v1(3.53,85.32) v1(3.68,13.08) v1(3.94,16.76) v1(4.22,27.13) v1(4.19,14.86) v1(4.29,86.79) v1(4.39,21.79) v1(5.66,14.15) v1(5.77,87.6) v1(5.84,25.65) v1(6.22,98.7) v1(6.22,15.88) v1(6.68,17.7) v1(6.81,23.5) v1(7.11,20.7) v1(7.49,31.37) v1(7.98,89.99) v1(8.13,63.68) v1(8.18,60.17) v1(8.36,8.56) v1(8.76,30.1) v1(9.27,54.1) v1(9.53,41.02) v1(9.53,39.75) v1(9.53,30.1) v1(9.65,43.81) v1(9.7,5.05) v1(9.78,98.83) v1(10.29,38.73) v1(10.67,92.46) v1(10.79,43.81) v1(10.79,30.1) v1(10.95,49.89) v1(11.13,44.96) v1(11.13,1.75) v1(11.33,57.53) v1(11.51,54.79) v1(11.46,51.28) v1(11.58,98.7) v1(11.56,38.73) v1(11.56,30.1) v1(11.66,56.34) v1(11.68,43.18) v1(11.84,46.94) v1(11.81,42.16) v1(11.91,58.52) v1(12.14,78.99) v1(12.14,76.2) v1(12.14,72.72) v1(12.12,70) v1(12.17,67.31) v1(14.35,48.64) v1(14.35,47.88) v1(14.35,46.99) v1(14.35,46.1) v1(14.61,56.77) v1(14.58,55.02) v1(14.61,39.75) v1(14.73,81.92) v1(14.73,80.9) v1(14.86,77.09) v1(14.86,76.07) v1(14.96,98.63) v1(15.37,79.76) v1(15.49,77.98) v1(15.49,74.68) v1(16.26,79.76) v1(16.38,74.68) v1(16.51,77.98) v1(16.81,96.62) v1(17.27,79.76) v1(17.27,74.68) v1(17.4,77.98) v1(17.65,77.09) v1(17.65,75.95) v1(17.91,57.91) v1(17.91,56.39) v1(18.03,82.04) v1(18.03,81.03) v1(19.18,40.01) v1(19.3,48.64) v1(19.3,47.88) v1(19.3,46.99) v1(19.3,46.1) v1(19.81,96.77) v1(20.02,98.78) v1(20.07,92.96) v1(20.9,48.01) v1(20.95,46.58) v1(21.54,43.43) v1(21.59,41.27) v1(21.59,39.37) v1(22.61,93.09) v1(23.09,99.01) v1(26.67,99.11) v1(27.18,91.31) v1(27.18,90.17) v1(27.33,95.66) v1(27.33,94.79) v1(27.28,93.93) v1(27.3,92.46) v1(27.56,21.84) v1(27.79,93.29) v1(28.45,20.45) v1(28.42,3.23) v1(28.57,23.67) v1(28.8,91.03) v1(29.01,89.92) v1(29.13,18.19) v1(29.72,99.11) v1(29.84,23.67) v1(29.97,20.45) v1(30.05,16.59) v1(30.02,8.76) v1(30.07,12.42) v1(30.23,1.68) v1(30.28,6.22) v1(30.43,89.87) v1(30.73,38.99) v1(30.84,3.81) v1(30.96,40.56) v1(30.99,21.84) v1(30.96,14.2) v1(31.04,10.16) v1(32,98.93) v1(32.26,90.02) v1(32.44,12.32) v1(32.89,92.08) v1(32.89,90.42) v1(33.4,98.81) v1(33.4,40.01) v1(34.26,41.2) v1(34.75,39.57) v1(34.8,98.81) v1(34.8,91.19) v1(34.77,2.72) v1(35.36,6.38) v1(35.56,89.53) v1(36.32,98.55) v1(36.32,89.53) v1(36.45,19.3) v1(37.21,98.55) v1(37.44,47.83) v1(37.44,46.94) v1(37.44,46) v1(37.47,48.77) v1(37.47,39.98) v1(37.47,19.3) v1(37.59,22.73) v1(37.8,5.28) v1(38.1,98.55) v1(38.1,26.92) v1(38.23,89.53) v1(38.3,7.37) v1(38.73,22.73) v1(38.73,19.3) v1(38.86,89.53) v1(39.14,98.5) v1(39.24,26.92) v1(40.03,98.5) v1(40.69,6.02) v1(41.4,2.03) v1(41.5,8) v1(41.91,48.64) v1(41.91,47.88) v1(41.91,46.99) v1(41.91,46.1) v1(41.91,39.88) v1(42.16,37.59) v1(42.8,38.48) v1(43.56,38.48) v1(43.74,79.12) v1(43.87,3.66) v1(44.48,61.9) v1(44.7,48.9) v1(44.7,47.88) v1(44.7,46.74) v1(44.78,81.99) v1(44.78,56.21) v1(45.62,7.75) v1(45.67,78.77) v1(45.95,48.36) v1(46.08,52.27) v1(46.35,88.57) v1(46.48,58.6) v1(46.61,55.09) v1(46.79,46.61) v1(47.45,12.62) v1(47.57,1.8) v1(47.68,85.27) v1(48.13,24.38) v1(48.23,97.41) v1(48.64,86.11) v1(48.67,6.86) v1(49.07,85.24) v1(49.15,24.38) v1(49.15,3.96) v1(49.23,89.23) v1(49.86,85.78) v1(50.32,89.31) v1(50.42,11.91) v1(50.7,86.03) v1(50.9,88.77) v1(51.49,9.25) v1(51.84,97.49) v1(52.37,2.36) v1(52.58,24.38) v1(52.58,23.37) v1(52.78,6.25) v1(53.34,50.55) v1(53.34,49.66) v1(53.34,48.77) v1(53.39,47.75) v1(53.98,23.37) v1(54.1,24.51) v1(54.61,94.23) v1(54.99,22.35) v1(56.39,22.35) v1(56.64,49.78) v1(56.64,48.9) v1(56.57,5.51) v1(56.69,47.68) v1(57.4,94.11) v1(57.4,24.51) v1(57.4,23.37) v1(57.78,92.71) v1(58.17,91.44) v1(58.29,41.53) v1(58.78,3.68) v1(59.05,91.57) v1(59.05,39.88) v1(59.64,48.67) v1(59.64,47.9) v1(59.64,47.02) v1(59.64,46.13) v1(60.33,48.64) v1(60.33,47.88) v1(60.33,46.99) v1(60.33,46.1) v1(60.33,5.59) v1(60.33,1.7) v1(60.45,26.92) v1(60.81,67.84) v1(61.72,91.95) v1(61.67,57.73) v1(61.98,75.26) v1(62.08,2.57) v1(62.36,26.92) v1(62.48,92.2) v1(62.59,68.96) v1(62.56,57.1) v1(62.99,67.54) v1(63.12,5.08) v1(63.98,69.39) v1(64.21,92.56) v1(64.24,91.57) v1(64.59,1.65) v1(64.8,32.33) v1(65.1,67.46) v1(65.35,97.28) v1(65.41,4.32) v1(65.48,95.17) v1(65.51,40.64) v1(65.86,38.38) v1(65.86,33.25) v1(66.04,5.71) v1(66.17,40.64) v1(66.55,92.84) v1(66.55,92.08) v1(66.55,91.19) v1(66.57,68.91) v1(66.73,97.54) v1(66.7,33.25) v1(67.31,92.84) v1(67.39,92.08) v1(67.59,2.21) v1(68.07,92.58) v1(68.33,97.41) v1(68.28,66.65) v1(68.58,73.41) v1(68.96,5.46) v1(69.82,68.63) v1(69.9,74.9) v1(69.88,64.52) v1(70.1,73.66) v1(70.66,61.34) v1(70.76,65.71) v1(70.99,64.41) v1(71.73,87.27) v1(71.75,88.95) v1(71.91,74.96) v1(71.88,68.68) v1(71.88,66.98) v1(71.88,65.25) v1(71.88,12.83) v1(71.88,11.81) v1(71.88,10.79) v1(72.03,60.53) v1(71.98,59.72) v1(71.98,57.84) v1(72.01,57) v1(72.01,54.71) v1(72.09,58.8) v1(72.26,8.13) v1(72.26,4.06) v1(72.49,88.95) v1(72.49,51.54) v1(72.47,44.73) v1(72.47,37.9) v1(72.49,35.46) v1(72.64,16.13) v1(72.69,87.27) v1(72.9,10.03) v1(72.87,1.55) v1(73.28,98.93) v1(73.41,6.86) v1(73.79,16.13) v1(74.12,91.01) v1(74.3,10.03) v1(74.42,1.78) v1(74.57,96.42) v1(74.68,4.57) v1(74.83,98.86) v1(74.8,16.13) v1(74.96,91.03) v1(75.06,12.7) v1(75.06,11.81) v1(75.06,10.92) v1(75.44,6.35) v1(75.79,94.34) v1(76.25,92.13) v1(76.28,91.03) v1(76.58,97.13) v1(77.47,1.78) v1(77.8,92.25) v1(77.8,91.06) v1(78.31,98.4) v1(78.36,25.78) v1(78.36,24.13) v1(78.49,71.53) v1(78.49,5.33) v1(78.66,69.24) v1(78.74,67.61) v1(78.77,96.29) v1(78.92,65.33) v1(78.87,62.87) v1(78.87,60.53) v1(78.87,3.43) v1(79.25,17.4) v1(79.3,24.13) v1(79.38,15.62) v1(79.38,1.65) v1(79.93,92.08) v1(80.01,17.4) v1(80.14,15.62) v1(80.37,97.82) v1(80.52,94.49) v1(80.64,3.81) v1(80.77,17.4) v1(81,92.08) v1(81.03,15.62) v1(81.92,56.39) v1(82.04,17.91) v1(82.04,15.62) v1(82.47,94.16) v1(82.68,40.01) v1(82.8,57.4) v1(82.8,42.29) v1(82.91,98.42) v1(82.96,68.43) v1(83.19,48.64) v1(83.19,47.88) v1(83.19,46.99) v1(83.19,46.1) v1(84.2,3.17) v1(84.84,5.59) v1(85.22,98.86) v1(85.98,93.37) v1(87,1.4) v1(87.63,48.64) v1(87.63,47.88) v1(87.63,46.1) v1(87.83,93.85) v1(87.96,97.97) v1(88.52,98.93) v1(88.77,91.69) v1(89.03,50.29) v1(89.03,49.28) v1(89.03,41.15) v1(89.03,40.39) v1(89.15,38.1) v1(90.04,51.44) v1(90.17,38.1) v1(90.17,2.29) v1(90.3,98.93) v1(90.55,90.93) v1(90.63,46.51) v1(90.68,45.72) v1(90.68,42.42) v1(90.78,8.94) v1(90.96,7.82) v1(91.06,51.44) v1(91.19,88.01) v1(91.31,89.92) v1(91.31,88.9) v1(91.31,46.48) v1(91.82,92.33) v1(91.82,32.77) v1(91.95,28.07) v1(91.95,25.65) v1(92.08,64.77) v1(92.08,60.45) v1(92.46,98.93) v1(92.71,32.77) v1(92.71,1.52) v1(92.84,28.07) v1(92.96,60.45) v1(93.09,65.28) v1(93.09,31.75) v1(93.09,30.61) v1(93.09,29.46) v1(93.47,28.45) v1(93.85,60.45) v1(93.85,32.77) v1(93.98,65.28) v1(94.23,24.38) v1(95.12,12.45) v1(95.12,11.56) v1(95.63,14.35) v1(96.39,91.06) v1(96.42,10.13) v1(96.65,98.93) v1(96.77,1.27) v1(96.9,84.33) v1(96.9,80.9) v1(96.9,14.35) v1(97.03,72.01) v1(97.03,69.09) v1(97.08,90.2) v1(97.28,79.12) v1(97.28,75.69) v1(97.41,88.01) v1(97.51,86.39) v1(98.04,8.89) v1(98.17,84.33) v1(98.17,80.9) v1(98.17,79.12) v1(98.3,90.93) v1(98.3,75.69) v1(98.4,88.62) v1(98.63,92.48) v1(98.55,12.45) v1(98.55,11.56) v1(98.55,10.67) v1(98.68,14.35) v1(98.68,3.17) v1(98.81,86.49) v1(98.93,97.28) v1(98.93,46.35) v1(98.86,41.5) v1(98.98,73.46) v1(98.96,7.16) v1(99.06,83.57) v1(99.06,82.42) v1(99.06,81.28) v1(99.11,79.43) v1(99.06,77.98) v1(99.06,76.71) v1(99.06,67.31) v1(99.06,61.09) v1(99.06,59.31) v1(99.11,56.16) v1(99.06,53.72) v1(99.09,50.98) v1(99.06,48.77) v1(99.06,37.97)
